# Altium PCB hat_template 2020V3.PcbDoc
Units mm, origin at the board's own origin, x right, y up, seen from the top; angles counter-clockwise.
Board outline 64 x 85 mm, 4 copper layers (Top Side, Ground Plane, Power Plane, Bottom Side), stack 0.844 mm thick; 101 components, 62 nets, 332 pads, 88 vias.
Unrouted connection lines stored in the file: 2.
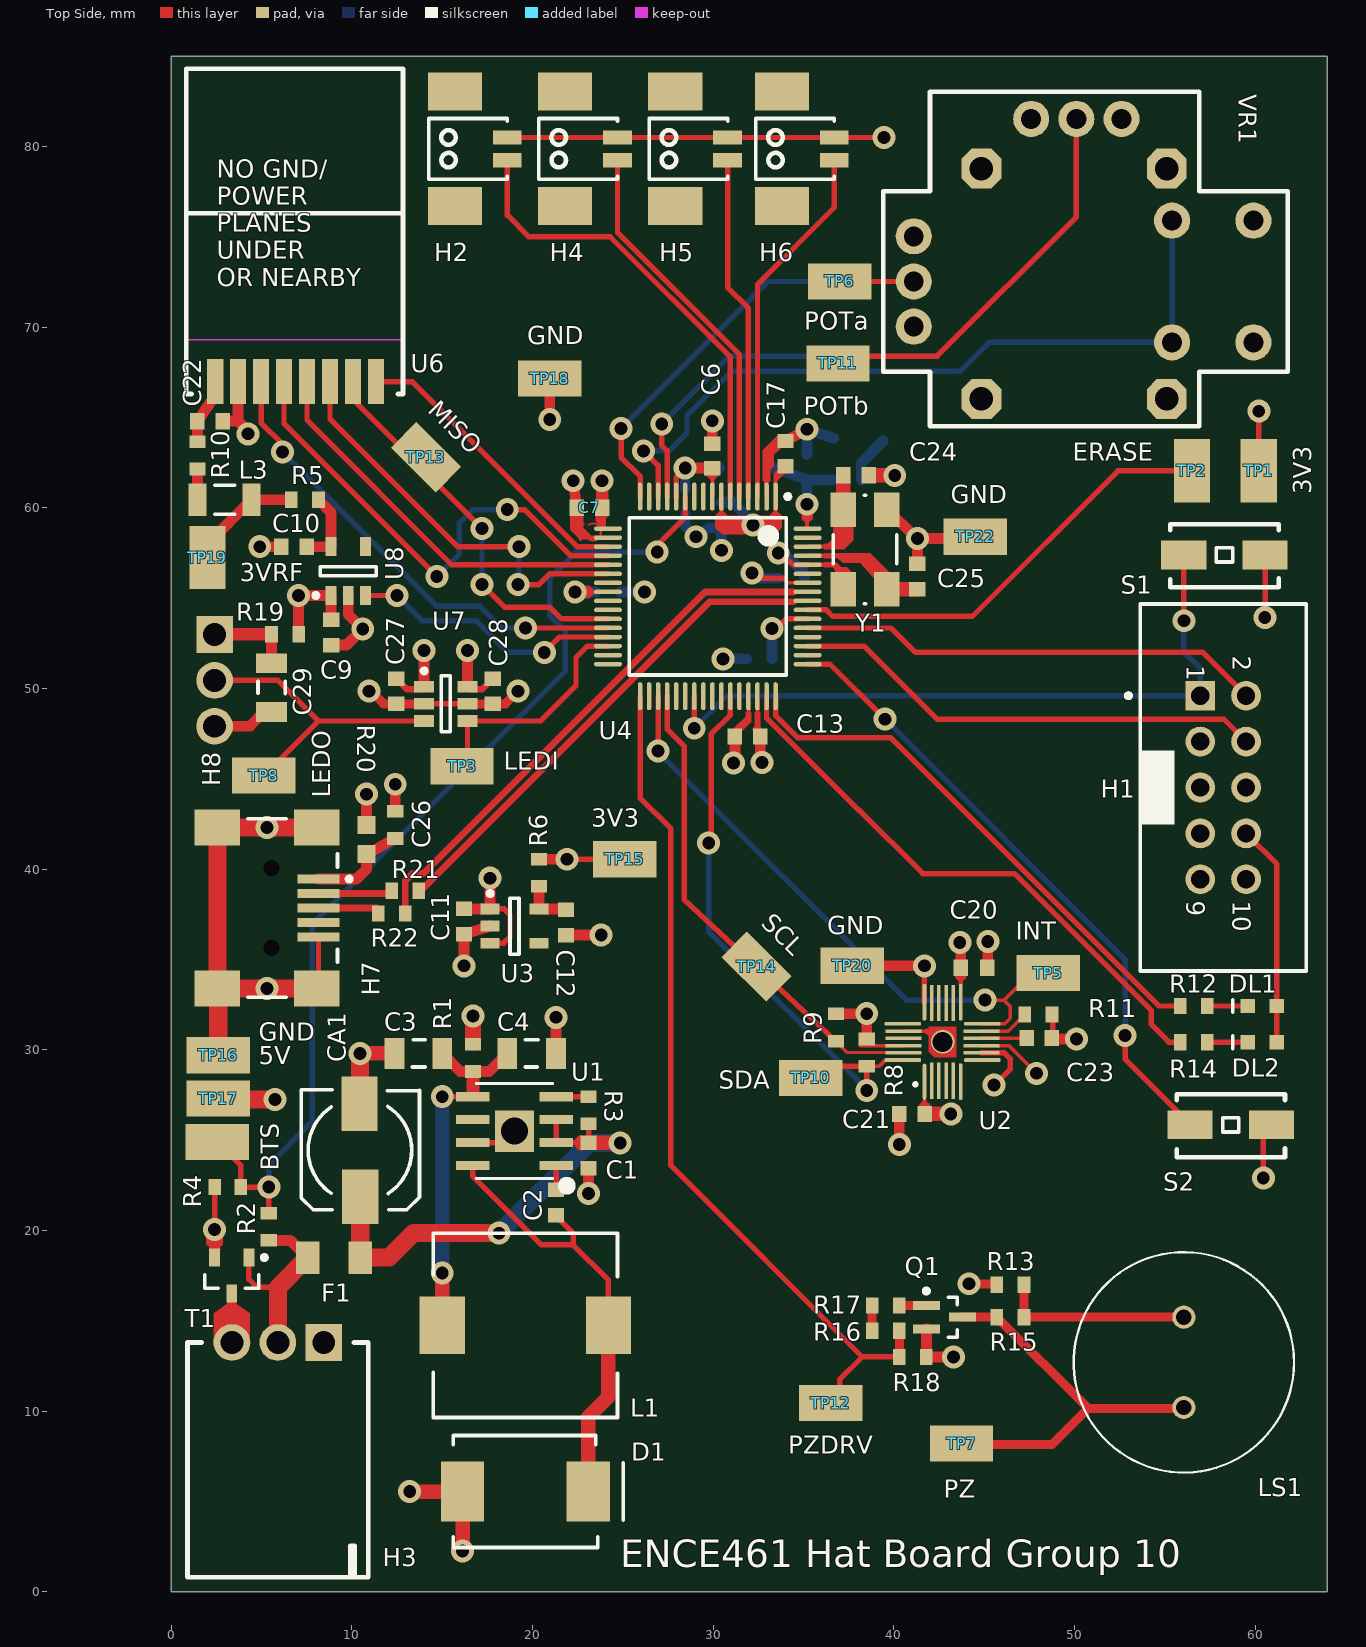
[diagram p0: Top Side view]
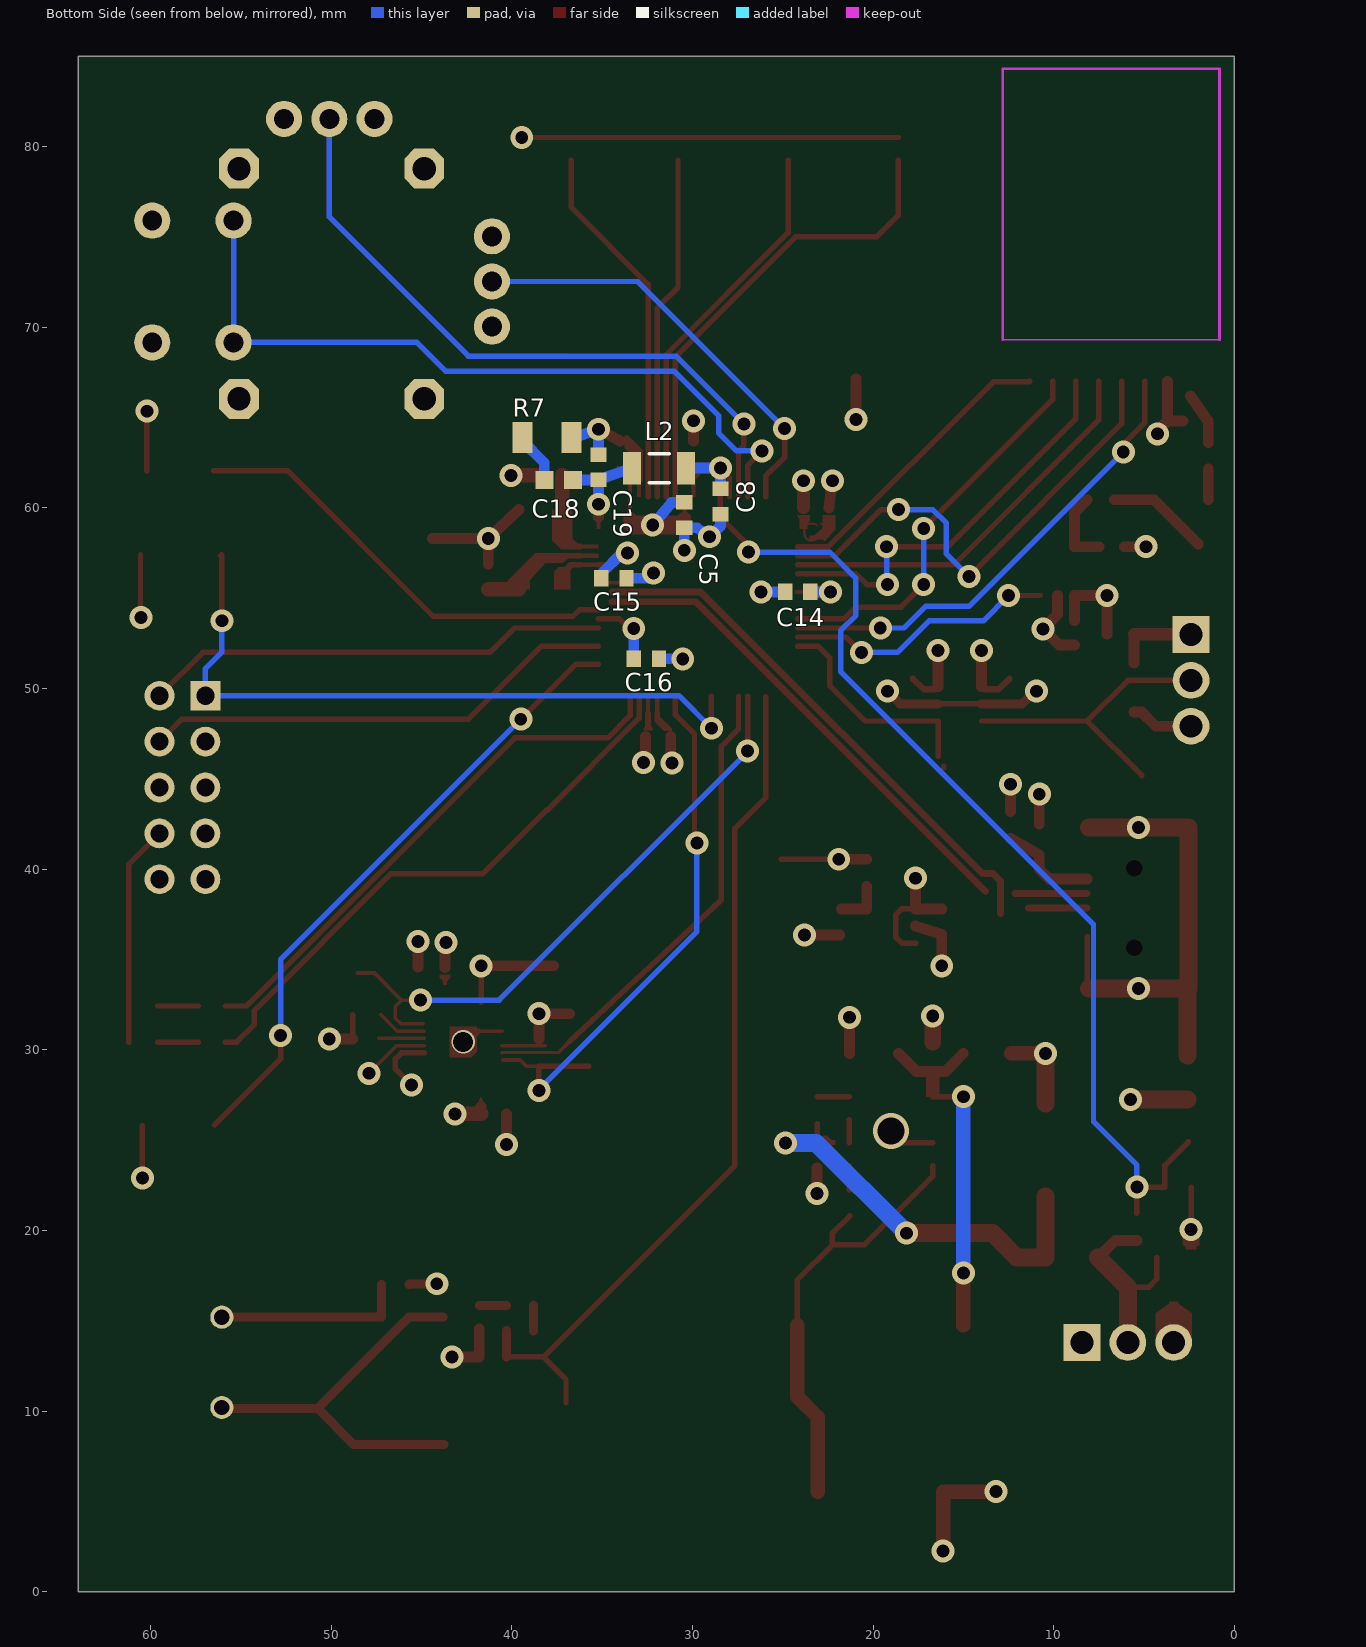
[diagram p1: Bottom Side view, seen from below]
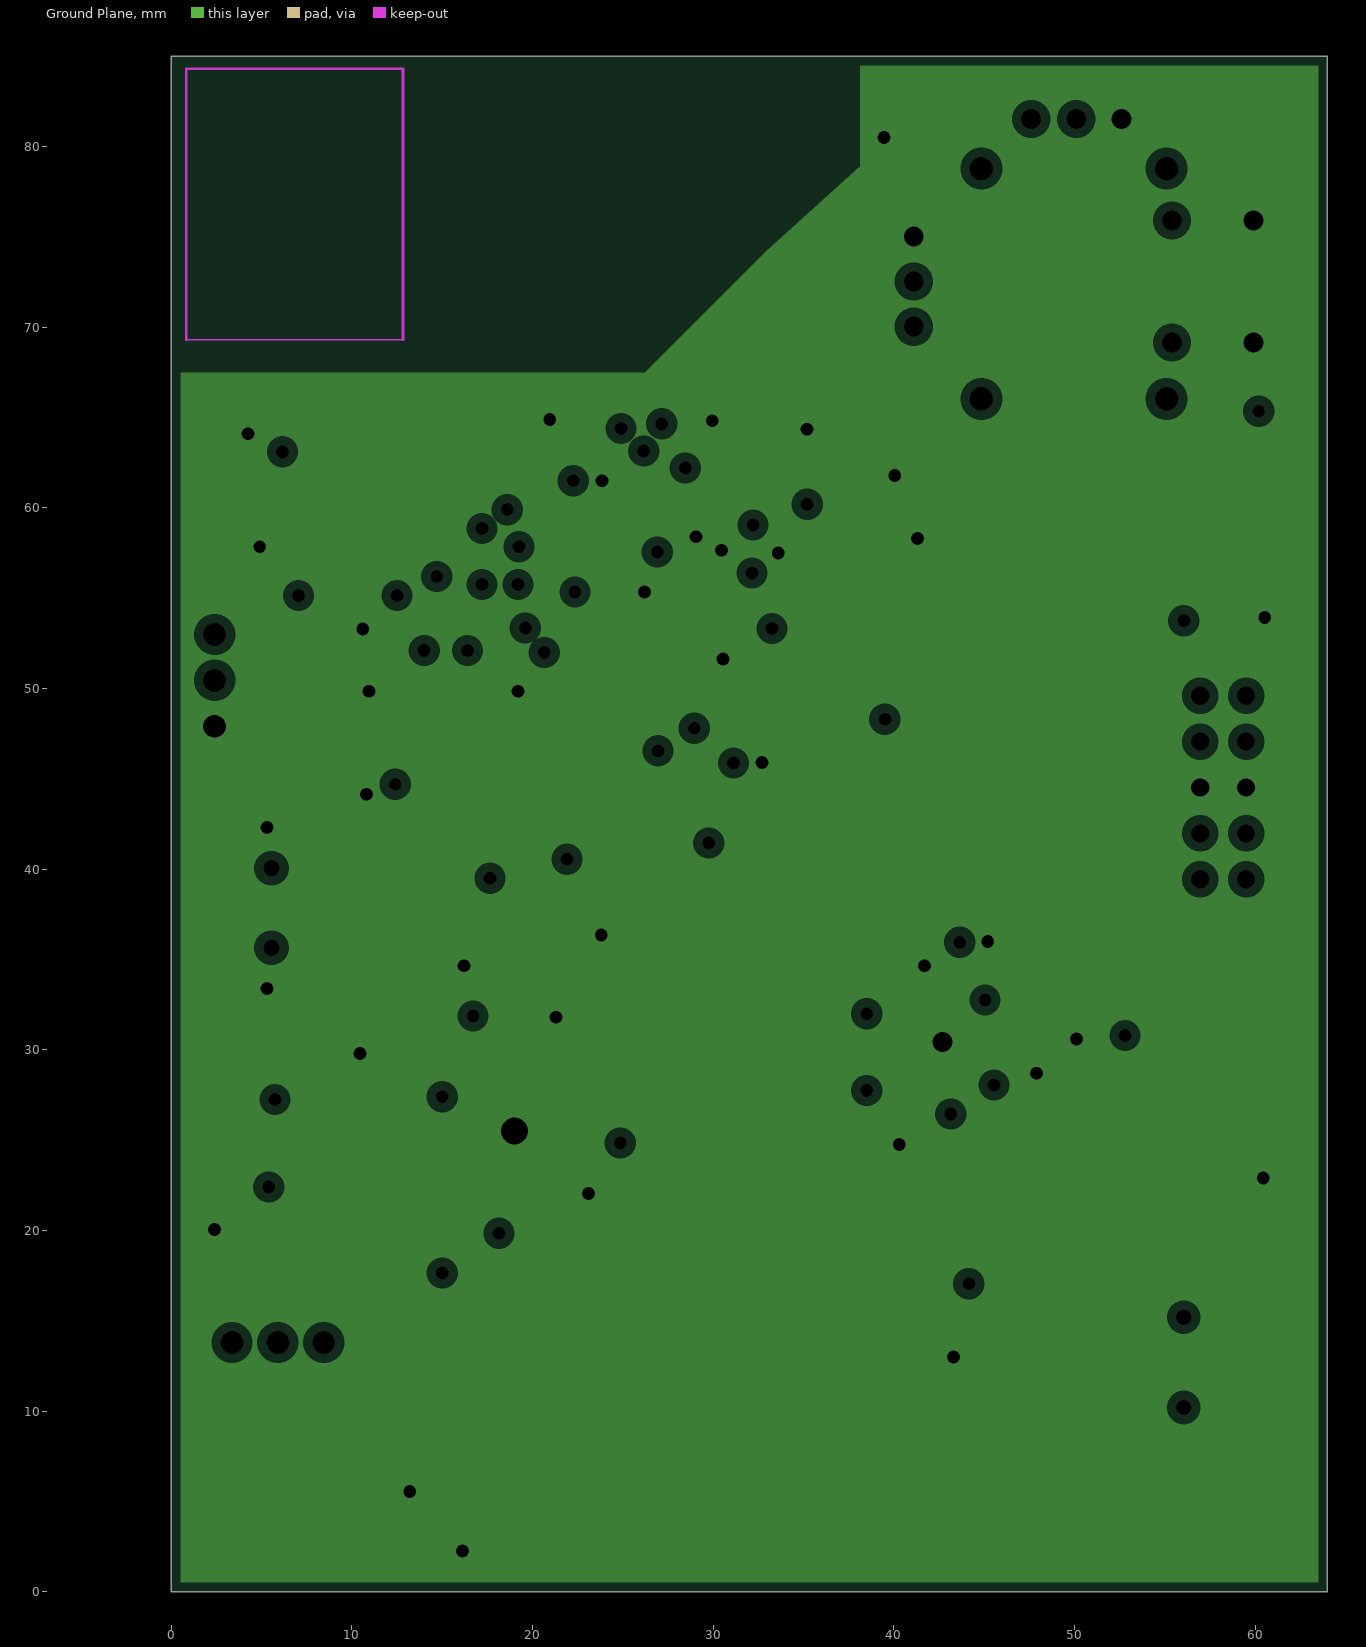
[diagram p2: Ground Plane, clearances drawn from the general rule]
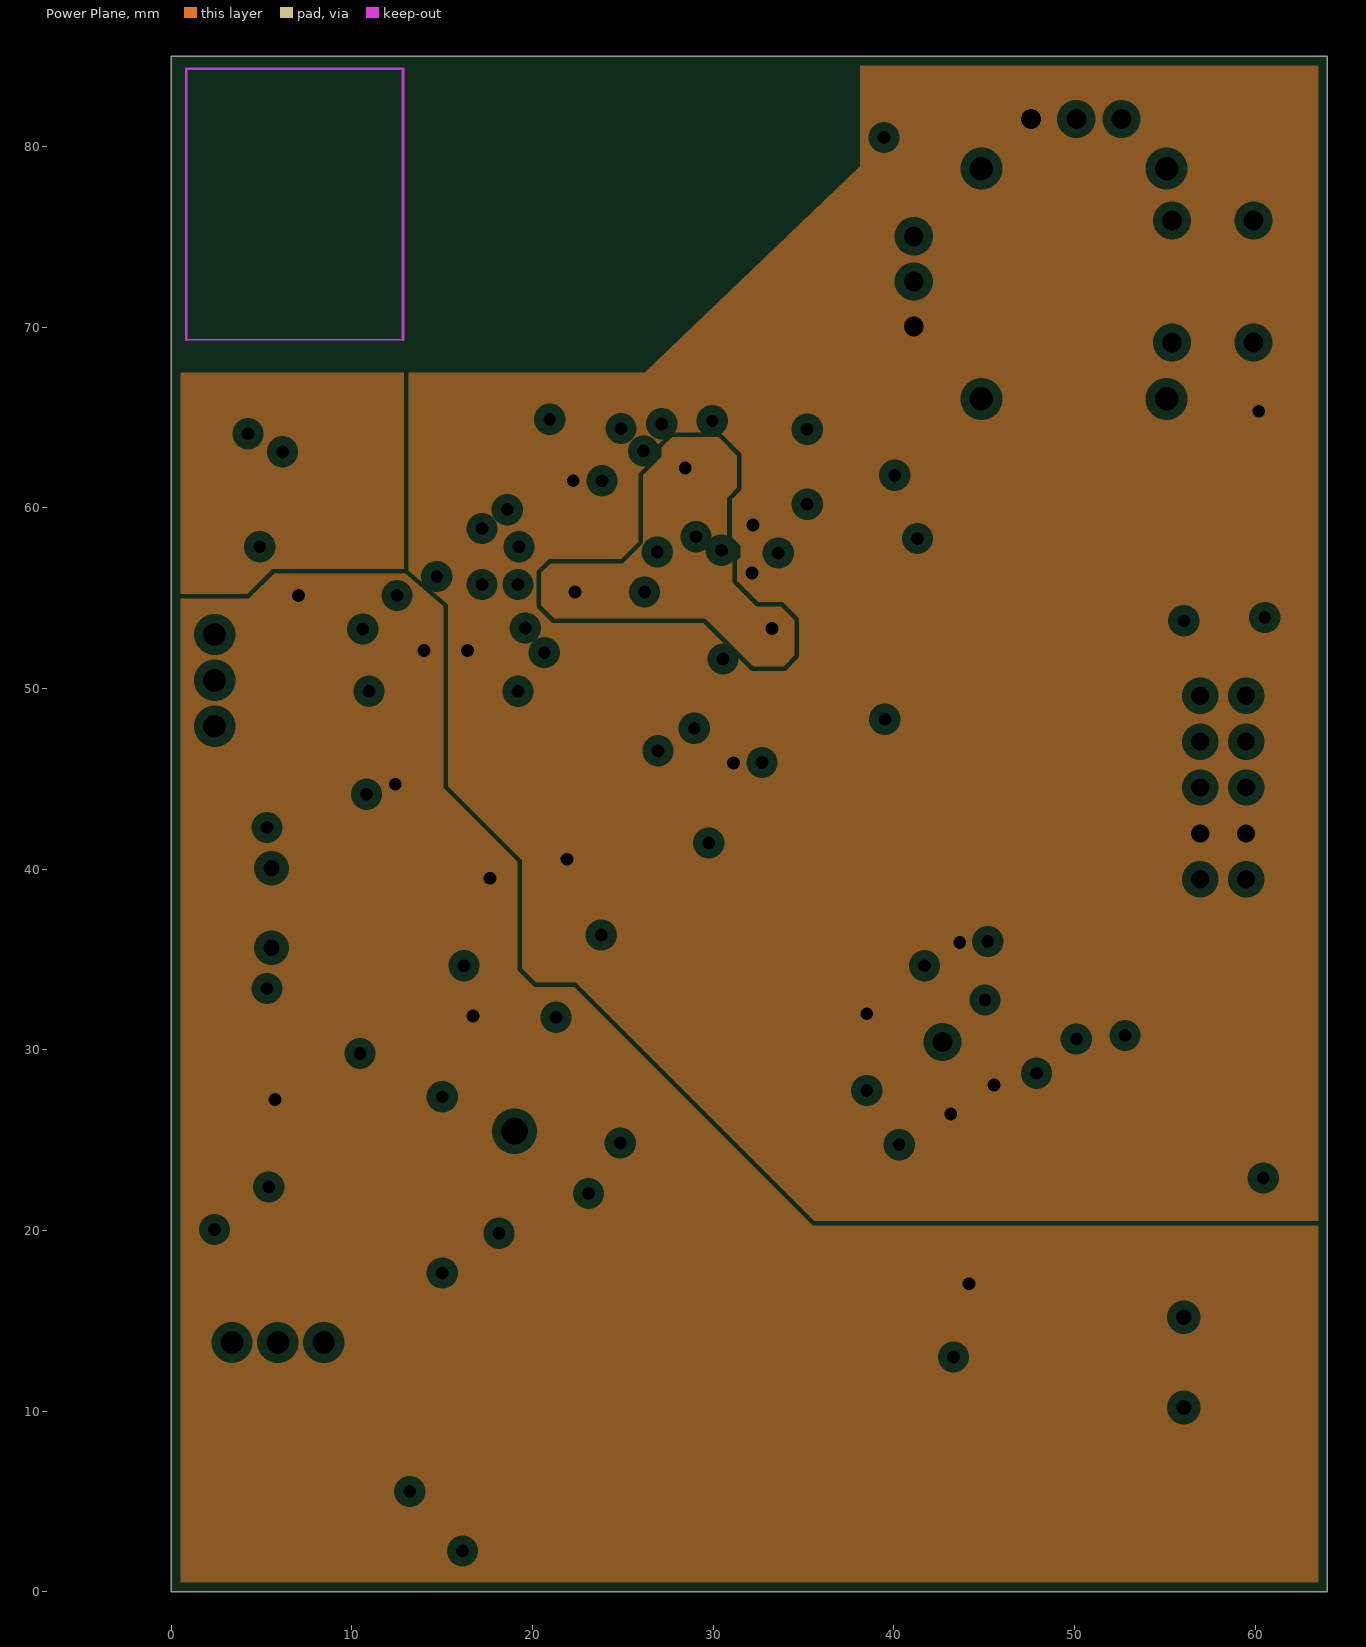
[diagram p3: Power Plane, clearances drawn from the general rule]

## Layer stack, top to bottom
Top Solder: solder mask 0.0102, Solder Resist, Dk 3.5
Top Side: signal copper 0.0356
Dielectric 1: core 0.32, FR-4, Dk 4.8
Ground Plane: plane copper 0.036, net GND
Dielectric 3: prepreg 0.127, Dk 4.2
Power Plane: plane copper 0.036, net (Multiple Nets)
Dielectric 4: core 0.254, Dk 4.2
Bottom Side: signal copper 0.0356
Bottom Solder: solder mask 0.0102, Solder Resist, Dk 3.5

## Board outline
0,85 64,85 64,0 0,0 0,85

## Design rules (kind name [scope] priority, off if disabled: settings)
BoardOutlineClearance [All] p1: gap=0.5 ignorepadtopadclearanceinfootprint=FALSE
Clearance Min_Clearance_Circuit_Labs [All] p1: gap=0.15 ignorepadtopadclearanceinfootprint=FALSE except(0: Arc-Hole Track-Hole SMDPad-Hole THPad-Hole Via-Hole Fill-Hole Poly-Hole Region-Hole Text-Hole)
DiffPairsRouting [All] p1: maxlimit=0.254 minlimit=0.254 mostfreqgap=0.254 toplayer_minwidth=0.381 toplayer_maxwidth=0.381 toplayer_prefwidth=0.381 bottomlayer_minwidth=0.381 bottomlayer_maxwidth=0.381 bottomlayer_prefwidth=0.381 maxuncoupledlength=12.7
FanoutControl Fanout_BGA [IsBGA] p1 off: bgadir=Out bgaviamode=Centered fanoutstyle=Auto fanoutdirection=Alternating viagrid=0.025 // Fanout_BGA (Default Rule)
HoleSize [All] p1: absolutevalues=TRUE maxlimit=10 minlimit=0.3 maxpercent=80.000 minpercent=20.000
MinimumAnnularRing [All] p1: minimumring=0.1
MinimumSolderMaskSliver [All] p1: minsoldermaskwidth=0.1
NetAntennae [All] p1: netantennaetolerance=1
PasteMaskExpansion [All] p1 off: expansion=0.2
PlaneClearance [All] p1: clearance=0.508
PlaneConnect [All] p1: planeconnectstyle=Relief reliefexpansion=0.508 reliefentries=4 reliefconductorwidth=0.254 reliefairgap=0.254
PolygonConnect [All] p1: connectstyle=Relief reliefconductorwidth=0.254 reliefentries=4 polygonreliefangle="90 Angle" airgapwidth=0.254
RoutingVias [All] p1: holewidth=0.5 width=1 viastyle="Through Hole" minholewidth=0.3 minwidth=0.6 maxholewidth=1 maxwidth=2
SMDNeckDown [All] p1 off: percent=50.000
SMDToCorner [All] p1: distance=98425
SMDToPlane [All] p1: distance=1968504
SilkToSolderMaskClearance SilkscreenOverComponentPads [IsPad] p1: minsilkscreentomaskgap=0.254 clearancetoexposedcopper=TRUE
SolderMaskExpansion [All] p1: expansion=0.102
ViasUnderSMD [All] p1: allowed=FALSE
Width [All] p1: maxlimit=2 minlimit=0.15 preferedwidth=0.3
21 further rules are at their usual default settings.

## Classes and differential pairs
component class "Test Points Sheet": BTS TP3 TP5 TP6 TP7 TP8 TP10 TP11 TP12 TP13 TP14 TP15 TP16 TP17 TP18 TP19 TP20 TP22
component class Connections: C26 C29 H1 H2 H3 H4 H5 H6 H7 H8 R19 R20 R21 R22
component class "Power Sheet": C1 C2 C3 C4 C5 C6 C7 C8 C9 C10 C11 C12 C13 C14 C15 C16 C17 C18 C19 CA1 D1 F1 L1 L2 R1 R2 R3 R4 R5 R6 R7 T1 U1 U3 U8
component class "Main Sheet": C20 C21 C22 C23 C24 C25 C27 C28 DL1 DL2 L3 LS1 Q1 R8 R9 R10 R11 R12 R13 R14 R15 R16 R17 R18 S1 S2 TP1 TP2 U2 U4 U6 U7 VR1 Y1
differential pair D: +D_P -D_N

## Components (designator, comment, footprint, x,y, rotation, side; value= is the part's Value field where it differs from the comment)
BTS "TP" TP_1206#1 2.55,24.9 r180 top (schematic designator TP21)
C1 "100nF" CAPC1608L#1 23.1,24.15 r90 top
C2 "100nF" CAPC1608L#1 21.3,21.55 r270 top
C3 "22uF" CAPC3216L#1 13.7,29.8 r0 top
C4 "22uF" CAPC3216L#2 19.95,29.8 r180 top
C5 "100nF" CAPC1608L#1 30.45,59.6 r90 bottom
C6 "100nF" CAPC1608L#2 29.95,62.85 r90 top
C7 "100nF" CAPC1608L#1 23.15,60 r180 top
C8 "100nF" CAPC1608L#1 28.45,60.35 r270 bottom
C9 "1uF" CAPC1608L#1 8.85,53.1 r90 top
C10 "1uF" CAPC1608L#1 6.8,57.85 r0 top
C11 "1uF" CAPC1608L#1 16.2,37.1 r90 top
C12 "1uF" CAPC1608L#1 21.85,37.05 r90 top
C13 "100nF" CAPC1608L#1 31.9,47.35 r180 top
C14 "100nF" CAPC1608L#1 24.175,55.35 r0 bottom
C15 "100nF" CAPC1608L#1 34.35,56.1 r180 bottom
C16 "100nF" CAPC1608L#1 32.55,51.65 r180 bottom
C17 "100nF" CAPC1608L#1 34,63 r270 top
C18 "4.7uF" CAPC1608N 37.4,61.55 r180 bottom
C19 "100nF" CAPC1608L#1 35.2,62.25 r270 bottom
C20 "100nF" CAPC1608L#3 44.4,34.55 r0 top
C21 "10nF" CAPC1608L#1 41,26.45 r180 top
C22 "10uF" CAPC1608L#1 2.15,64.8 r180 top
C23 "100nF" CAPC1608L#1 48.05,30.65 r0 top
C24 "27pF" CAPC1608L#1 37.9,61.8 r180 top
C25 "27pF" CAPC1608L#1 41.3,56.2 r270 top
C26 "4.7uF" CAPC1608N 10.8,41.65 r90 top
C27 "10nF" CAPC1608L#1 12.45,49.85 r90 top
C28 "10nF" CAPC1608L#1 17.8,49.85 r90 top
C29 "22uF" CAPC3216L#2 5.55,50.05 r90 top
CA1 "100uF/16V" NICH-1 10.45,24.45 r270 top
D1 "VS-30BQ015-M3/9AT" SMC 19.6,5.55 r0 top
DL1 "Bright Green" WL-SMCW0603 59.6,32.425 r0 top
DL2 "Red" WL-SMCW0603 59.6,30.425 r0 top
F1 "5A" RESC3216N 9,18.5 r0 top
H1 "Header 5X2 Vert" IDC2.54-V10D 58.23,44.52 r270 top
H2 "SMD Vert 1.25mm" SD-53398-0219 18.6,80.5 r90 top
H3 "Battery_HEADER_3pin" BATT_HEADER_3POS 5.9,13.8 r180 top
H4 "SMD Vert 1.25mm" SD-53398-0219 24.7,80.5 r90 top
H5 "SMD Vert 1.25mm" SD-53398-0219 30.8,80.5 r90 top
H6 "SMD Vert 1.25mm" SD-53398-0219 36.7,80.5 r90 top
H7 "JS_USB_MINI_B" USB/SM0.8-6H5 0.3,37.85 r180 top
H8 "HEADER_3" HEADER_3POS 2.4,50.45 r270 top
L1 "IND 5.2UH 6A" INDUCTOR5u2 19.6,14.75 r180 top
L2 "1A max, Idc 0.3R," INDC3216L 31.85,62.2 r180 bottom
L3 "1A max, Idc 0.3R," INDC3216L 2.95,60.45 r180 top
LS1 "PS1240P02BT" XDCR_PS1240P02BT 56.05,12.7 r90 top
Q1 "BC817W" SOT323_M 42.8,15.2 r0 top
R1 "0R" RESC1608L#1 16.7,29.55 r90 top
R2 "200K" RESC1608L#1 5.4,20.2 r270 top
R3 "100K" RESC1608L#1 23.1,26.65 r90 top
R4 "100K" RESC1608L#2 3.15,22.4 r0 top
R5 "0R" RESC1608L#1 7.4,60.45 r180 top
R6 "0R" RESC1608L#1 20.35,39.8 r90 top
R7 "1R" RESC3216L 38.05,63.9 r0 bottom
R8 "2K2" RESC1608L#1 38.5,29.85 r90 top
R9 "2K2" RESC1608L#3 36.8,31.25 r270 top
R10 "10R" RESC1608L#1 1.45,62.9 r270 top
R11 "0R" RESC1608L#1 48,31.95 r180 top
R12 "470R" RESC1608L#1 56.6,32.425 r180 top
R13 "0R" RESC1608L#1 46.45,17 r180 top
R14 "680R" RESC1608L#1 56.6,30.425 r180 top
R15 "1K" RESC1608L#1 46.45,15.2 r0 top
R16 "10R" RESC1608L#1 39.55,14.45 r180 top
R17 "0R" RESC1608L#1 39.55,15.85 r0 top
R18 "1K" RESC1608L#1 41.05,13 r180 top
R19 "0R" RESC1608L#1 6.3,53 r0 top
R20 "0R" RESC1608L#1 12.4,42.45 r90 top
R21 "27R" RESC1608L#1 12.95,38.8 r0 top
R22 "27R" RESC1608L#1 12.2,37.55 r0 top
S1 "EVQPNF05M" EVQPNF05M 58.3,57.4 r180 top
S2 "EVQPNF05M" EVQPNF05M 58.65,25.85 r180 top
T1 "BSH105,215" SOT23_L 3.35,17.5 r270 top
TP1 "Erase" TP_1206#1 60.2,62.05 r90 top value=TP
TP2 "Erase" TP_1206#1 56.5,62.05 r90 top value=TP
TP3 "TP" TP_1206#1 16.1,45.7 r180 top
TP5 "TP" TP_1206#1 48.55,34.25 r0 top
TP6 "TP" TP_1206#1 37,72.53 r0 top
TP7 "TP" TP_1206#2 43.75,8.15 r0 top
TP8 "TP" TP_1206#1 5.125,45.175 r0 top
TP10 "TP" TP_1206#1 35.4,28.45 r0 top
TP11 "TP" TP_1206#1 36.9,68 r0 top
TP12 "TP" TP_1206#1 36.5,10.45 r0 top
TP13 "TP" TP_1206#1 14.1,62.8 r135 top
TP14 "TP" TP_1206#1 32.4,34.6 r135 top
TP15 "TP" TP_1206#1 25.1,40.55 r180 top
TP16 "TP" TP_1206#1 2.6,29.7 r180 top
TP17 "TP" TP_1206#1 2.6,27.3 r180 top
TP18 "TP" TP_1206#1 20.95,67.15 r180 top
TP19 "TP" TP_1206#1 2,57.25 r270 top
TP20 "TP" TP_1206#1 37.7,34.65 r0 top
TP22 "TP" TP_1206#1 44.5,58.4 r180 top
U1 "ADP2302ARDZ-5.0 BUCK" RD_8_1 19,25.5 r180 top locked value=Value
U2 "MPU-9250" QUAD24 41.693,29.085 r90 top locked
U3 "CAT6219-330TDGT3" SOT95P280X145-5N 19,36.85 r0 top
U4 "ATSAM4S8BA-ANR" LQFP64_L 29.7,55.1 r270 top locked
U6 "nRF24 SMD" NRF24 0.829,66.3 r0 top
U7 "SN74LVC1T45" SOT23-6_N 15.2,49.15 r0 top
U8 "CAT6219-330TDGT3" SOT95P280X145-5N 9.8,56.5 r90 top
VR1 "Joystick 10k with Sw" Joystick_Sw 41.1,72.53 r180 top
Y1 "12MHz" 6.0X3.5-4 38.4,57.7 r90 top

## Footprints (in the part's own frame and the unit in brackets; to place one, negate y for a bottom-side part, rotate by r counter-clockwise, add the part's x,y. Pads: shape width x height; smd on the part's side, far side on the other; paste and mask are expansions set on the pad)
6.0X3.5-4 [mm] "4 SMD 6.0X3.5 mm No Lead Crystal"
  rect 1.9x1.4 smd: 1(-2.2,-1.2) 2(2.2,-1.2) 3(2.2,1.2) 4(-2.2,1.2)
  silkscreen extent -3,-1.75 3,1.75, body extent -3,-1.75 3,1.75, height 1.2
BATT_HEADER_3POS [mil]
  rect 80x80 hole 50: 1(-100,0)
  round 80 hole 50: 2(0,0) 3(100,0)
  silkscreen extent -197,0 197,512
CAPC1608L#1 [mm] "Chip Capacitor, Body 1.6x0.8mm, IPC High Density"
  rect 0.8x0.9 smd: 1(-0.7,0) 2(0.7,0)
  body extent -0.87,-0.48 0.87,0.48, height 0.85
CAPC1608L#2 [mm] "Chip Capacitor, Body 1.6x0.8mm, IPC High Density"
  rect 0.8x0.9 smd: 1(-0.65,0) 2(0.7,0)
  body extent -0.87,-0.48 0.87,0.48, height 0.85
CAPC1608L#3 [mm] "Chip Capacitor, Body 1.6x0.8mm, IPC High Density"
  rect 0.8x0.9 smd: 1(-0.7,0) 2(0.757,0)
  body extent -0.87,-0.48 0.87,0.48, height 0.85
CAPC1608N [mm] "Chip Capacitor, Body 1.6x0.8mm, IPC Medium Density"
  rect 1x1 smd: 1(-0.8,0) 2(0.8,0)
  body extent -0.87,-0.48 0.87,0.48, height 0.85
CAPC3216L#1 [mm] "Chip Capacitor, Body 3.2x1.6mm, IPC High Density"
  rect 1.1x1.7 smd: 1(-1.35,0) 2(1.3,0)
  silkscreen extent -0.35,-0.75 0.35,0.75, body extent -1.7,-0.9 1.7,0.9, height 1.35
CAPC3216L#2 [mm] "Chip Capacitor, Body 3.2x1.6mm, IPC High Density"
  rect 1.1x1.7 smd: 1(-1.35,0) 2(1.35,0)
  silkscreen extent -0.35,-0.75 0.35,0.75, body extent -1.7,-0.9 1.7,0.9, height 1.35
EVQPNF05M [mm] "Panansonic light touch SMD push button switch"
  rect 2.5x1.6 smd: 1(-2.25,0) 2(2.25,0)
  silkscreen extent -3,-1.7 3,1.8, body extent -3,-1.7 3,1.8, height 5
HEADER_3POS [mil]
  rect 80x80 hole 50: 1(-100,0)
  round 80 hole 50: 2(0,0) 3(100,0)
IDC2.54-V10D [mm] "Connector; IDC, Low Profile Male Header, Thru-Hole; 10 Position; Vertical; Pitch 2.54 mm; Body 20.32 x 9.2 x 9.45 mm (LxWxH)"
  rect 1.65x1.65 hole 1: 1(-5.08,-1.27)
  round 1.65 hole 1: 2(-5.08,1.27) 3(-2.54,-1.27) 4(-2.54,1.27) 5(0,-1.27) 6(0,1.27) 7(2.54,-1.27) 8(2.54,1.27) 9(5.08,-1.27) 10(5.08,1.27)
  silkscreen extent -10.16,-5.37 10.16,4.6, body extent -10.16,-4.6 10.16,4.6, height 9.45
INDC3216L [mm] "Chip Inductor, Body 3.2x1.6mm, IPC High Density"
  rect 1x1.8 smd: 1(-1.5,0) 2(1.5,0)
  silkscreen extent -0.55,-0.8 0.55,0.8, body extent -1.75,-0.95 1.75,0.95, height 1.9
INDUCTOR5u2 [mm]
  rect 2.5x3.2 smd: 1(-4.6,0) 2(4.6,0)
  silkscreen extent -5.1,-5.1 5.1,5.1
Joystick_Sw [mm]
  round 2 hole 1.1: 1(0,2.5) 2(0,0) 3(0,-2.5) 4(-6.5,-9) 5(-9,-9) 6(-11.5,-9) 7(-14.3,-3.37) 8(-18.8,-3.37) 9(-18.8,3.37) 10(-14.3,3.37)
  oct 2.2x2.2 hole 1.3: 11(-14,-6.25) 12(-3.75,-6.25) 13(-14,6.5) 14(-3.75,6.5)
  silkscreen extent -20.7,-10.5 1.7,8
LQFP64_L [mm] "Thin QFP, 64-Leads, Body 10x10mm, Pitch 0.5mm, IPC High Density"
  oval 1.55x0.25 smd mask+0.07: 1(-5.525,3.75) 2(-5.525,3.25) 3(-5.525,2.75) 4(-5.525,2.25) 5(-5.525,1.75) 6(-5.525,1.25) 7(-5.525,0.75) 8(-5.525,0.25) 9(-5.525,-0.25) 10(-5.525,-0.75) 11(-5.525,-1.25) 12(-5.525,-1.75) 13(-5.525,-2.25) 14(-5.525,-2.75) 15(-5.525,-3.25) 16(-5.525,-3.75) 33(5.525,-3.75) 34(5.525,-3.25) 35(5.525,-2.75) 36(5.525,-2.25) 37(5.525,-1.75) 38(5.525,-1.25) 39(5.525,-0.75) 40(5.525,-0.25) 41(5.525,0.25) 42(5.525,0.75) 43(5.525,1.25) 44(5.525,1.75) 45(5.525,2.25) 46(5.525,2.75) 47(5.525,3.25) 48(5.525,3.75)
  oval 0.25x1.55 smd mask+0.07: 17(-3.75,-5.525) 18(-3.25,-5.525) 19(-2.75,-5.525) 20(-2.25,-5.525) 21(-1.75,-5.525) 22(-1.25,-5.525) 23(-0.75,-5.525) 24(-0.25,-5.525) 25(0.25,-5.525) 26(0.75,-5.525) 27(1.25,-5.525) 28(1.75,-5.525) 29(2.25,-5.525) 30(2.75,-5.525) 31(3.25,-5.525) 32(3.75,-5.525) 49(3.75,5.525) 50(3.25,5.525) 51(2.75,5.525) 52(2.25,5.525) 53(1.75,5.525) 54(1.25,5.525) 55(0.75,5.525) 56(0.25,5.525) 57(-0.25,5.525) 58(-0.75,5.525) 59(-1.25,5.525) 60(-1.75,5.525) 61(-2.25,5.525) 62(-2.75,5.525) 63(-3.25,5.525) 64(-3.75,5.525)
  silkscreen extent -5.65,-4.35 4.35,4.55, body extent -5,-5 5,5, height 1.6
NICH-1 [mm] "Electrolytic capacitor"
  rect 3x2 smd: 1(-2.561,-0.022) 2(2.584,0.011)
  silkscreen extent -3.34,-3.25 3.3,3.3, body extent -3.2,-3.2 3.2,3.2, height 5.3
NRF24 [mm]
  rect 0.9x2.5 smd: 1(1.6,0.7) 2(2.871,0.7) 3(4.143,0.7) 4(5.414,0.7) 5(6.686,0.7) 6(7.957,0.7) 7(9.229,0.7) 8(10.5,0.7)
  Keep-Out Layer lines w0.1: 0,3 12,3
  Keep-Out Layer lines w0.15: 0,3 0,18 12,18 12,3
  silkscreen extent 0,0 12,18
QUAD24 [mm]
  oval 2x0.2 smd paste+0.02 mask+0.015: 1(-0.85,0)
  rect 2x0.2 smd paste+0.02 mask+0.015: 2(-0.8,-0.4) 3(-0.8,-0.8) 4(-0.8,-1.2) 5(-0.8,-1.6) 14(3.5,-1.6) 15(3.5,-1.2) 16(3.5,-0.8) 17(3.5,-0.4)
  rrect50% 2x0.2 smd paste+0.02 mask+0.015: 6(-0.85,-2) 13(3.55,-2) 18(3.55,0)
  rrect50% 0.2x2 smd paste+0.02 mask+0.015: 7(0.35,-3.2) 12(2.35,-3.2) 19(2.35,1.2) 24(0.35,1.2)
  rect 0.2x2 smd paste+0.02 mask+0.015: 8(0.75,-3.15) 9(1.15,-3.15) 10(1.55,-3.15) 11(1.95,-3.15) 20(1.95,1.15) 21(1.55,1.15) 22(1.15,1.15) 23(0.75,1.15)
  Top Side region: 0.5,-1.75 0.5,-0.55 0.8,-0.25 2.2,-0.25 2.2,-1.75
  silkscreen extent -1.05,0.45 -0.95,0.55
RD_8_1 [mil]
  rect 74x20 smd paste+0 mask+0: 1(-91,75) 2(-91,25) 3(-91,-25) 4(-91,-75) 5(91,-75) 6(91,-25) 7(91,25) 8(91,75)
  rect 84.65x90 smd paste-44.5 mask+0: EPAD(0,0)
  silkscreen extent -118,-104 84,123, body extent 0,0 10,10, height 10
RESC1608L#1 [mm] "Chip Resistor, Body 1.6x0.8mm, IPC High Density"
  rect 0.7x0.9 smd: 1(-0.75,0) 2(0.75,0)
  body extent -0.85,-0.48 0.85,0.48, height 0.9
RESC1608L#2 [mm] "Chip Resistor, Body 1.6x0.8mm, IPC High Density"
  rect 0.7x0.9 smd: 1(-0.75,0) 2(0.7,0)
  body extent -0.85,-0.48 0.85,0.48, height 0.9
RESC1608L#3 [mm] "Chip Resistor, Body 1.6x0.8mm, IPC High Density"
  rect 0.7x0.9 smd: 1(-0.75,0) 2(0.785,0)
  body extent -0.85,-0.48 0.85,0.48, height 0.9
RESC3216L [mm] "Chip Resistor, Body 3.1x1.6mm, IPC High Density"
  rect 1.1x1.7 smd: 1(-1.35,0) 2(1.35,0)
  body extent -1.68,-0.87 1.68,0.87, height 2.54
RESC3216N [mm] "Chip Resistor, Body 3.2x1.6mm, IPC Medium Density"
  rect 1.3x1.8 smd: 1(-1.45,0) 2(1.45,0)
  body extent -1.68,-0.87 1.68,0.87, height 0.71
SD-53398-0219 [mm] "Molex Pico Blade 2 Pos Vert SMD Header"
  rect 0.8x1.6 smd: 1(0,0) 2(-1.25,0)
  rect 2.1x3 smd: M(-3.8,2.9) M(2.55,2.9)
  silkscreen extent -2.3,0 1.05,4.35, body extent -2.48,0.1 1.28,4.24, height 4.75
SMC [mm] "DO-214-AB/SMC; 2 C-Bend Leads; Body 7.9 x 5.9 mm, inc. leads (LxW)"
  rect 2.4x3.3 smd: 1(-3.475,0) 2(3.475,0)
  silkscreen extent -4,-3.1 5.43,3.1
SOT23-6_N [mm]
  rect 1.1x0.65 smd: 1(-1.2,0.95) 2(-1.2,0) 3(-1.2,-0.95) 4(1.2,-0.95) 5(1.2,0) 6(1.2,0.95)
  silkscreen extent -1.32,-1.55 0.25,1.95, body extent -0.9,-1.55 0.9,1.55, height 1.45
SOT23_L [mm] "SOT23, 3-Leads, Body 2.9x1.3mm, Pitch 0.95mm, Lead Span 2.3mm, IPC High Density"
  rect 1x0.6 smd: 1(-1,0.95) 2(-1,-0.95) 3(1,0)
  silkscreen extent -1.12,-1.5 0.7,1.93, body extent -0.7,-1.5 0.7,1.5, height 1.1
SOT95P280X145-5N [mm] "SOT23, 5-Leads, Body 2.90x2.80mm, Pitch 0.95mm, IPC Medium Density"
  rect 1.05x0.6 smd: 1(-1.35,0.95) 2(-1.35,0) 3(-1.35,-0.95) 4(1.35,-0.95) 5(1.35,0.95)
  silkscreen extent -1.47,-1.55 0.25,1.92, body extent -0.87,-1.52 0.87,1.53, height 1.45
SOT323_M [mm] "SOT323, 3-Leads, Body 2.0x1.3mm, Pitch 0.65mm, Lead Span 2.1mm, IPC Low Density"
  rect 1.5x0.5 smd: 1(-1,0.65) 2(-1,-0.65) 3(1,0)
  silkscreen extent -1.12,-1.1 0.7,1.57, body extent -0.7,-1.1 0.7,1.1, height 1.1
TP_1206#1 [mm] "Test Point Pad"
  rect 3.5x2 smd: 1(0,0)
  body extent -1.62,-0.85 1.63,0.8, height 2
TP_1206#2 [mm] "Test Point Pad"
  rect 3.5x2 smd: 1(0,0.05)
  body extent -1.62,-0.85 1.63,0.8, height 2
USB/SM0.8-6H5 [mm] "Connector; USB2.0, Type B, SM; 5 Position; Right Angle"
  rect 2.3x0.5 smd mask+0.07: 1(-7.85,-1.6) 2(-7.85,-0.8) 3(-7.85,0) 4(-7.85,0.8) 5(-7.85,1.6)
  rect 2.5x2 smd: 6(-7.75,4.45) 7(-2.25,4.45) 8(-7.75,-4.45) 9(-2.25,-4.45)
  round 0.6 hole 0.9 unplated: MH1(-5.25,2.2) MH2(-5.25,-2.2)
  silkscreen extent -9.68,-4.95 -3.95,4.95, body extent -8.9,-4.95 0.7,4.95, height 3.9
WL-SMCW0603 [mm] "2.4 x 0.8 x 0.7mm LED"
  rect 0.8x0.8 smd: 1(0,0) 2(1.6,0)
  silkscreen extent -0.85,-0.35 -0.85,0.35
XDCR_PS1240P02BT [mm]
  round 1.28 hole 0.85: 1(-2.5,0) 2(2.5,0)
  silkscreen extent -6.1,-6.1 6.1,6.1

## Part data
BTS TP1 TP2 TP3 TP5 TP6 TP7 TP8 TP10 TP11 TP12 TP13 TP14 TP15 TP16 TP17 TP18 TP19 TP20 TP22: library part TP_1206, "Test-Point 3.3x1.6x2.1mm SMD", Manufacturer="Harwin Inc", Manufacturer Part Number=S1751-46R, Supplier Part Number 1=952-1478-2-ND, Mounting Type="Surface Mount", Storage Location=ProtoPlace, Supplier="ECE Dept", Supplier 1=Digi-Key, Supplier 2=Farnell, Supplier Part Number 2=1826282, Type="PC Test Point"
C1 C2 C5 C6 C7 C8 C13 C14 C15 C16 C17 C19 C20 C23: library part CC_100nF_0603, "CAP CER 100nF X7R +-10% 50V 0603", Code_IPC="1608 [0603]", PackageReference=0603, Storage Location="PCB Assembly WS", Supplier="ECE Dept"
C3 C4 C29: library part CC_22uF_1206, "CAP CER 22uF Y5V -20% +80% 10V 1206", Dielectric=Y5V, Max Voltage=10V, Storage Location="PCB Assembly WS", Supplier="ECE Dept"
C9 C10 C11 C12: library part CC_1uF_0603, "CAP CER 1uF Y5V -20% +80% 16V 0603", Max Voltage=16V, Code_IPC="1608 [0603]", PackageReference=0603, Storage Location="PCB Assembly WS", Supplier="ECE Dept"
C18 C26: library part CC_4.7uF_0603, "CAP CER 4.7uF X5R +-20%  10V 0603", Max Voltage=10V, Code_IPC=2012[0805], Note="Footprint corresponds to dimensions for bulk cassette packaging. This case size has tightened tolerances.", PackageReference=0805, Storage Location="PCB Assembly WS", Supplier="ECE Dept"
C21 C27 C28: library part CC_10nF_0603, "CAP CER 10nF X7R +-10% 50V 0603", Code_IPC="1608 [0603]", PackageReference=0603, Storage Location="PCB Assembly WS", Supplier="ECE Dept"
C22: library part CC_10uF_0603, "CAP CER 10UF X5R +-20% 6V3 0603", Voltage - Rated=6.3V, Storage Location="PCB Assembly WS", Supplier="ECE Dept"
C24 C25: library part CC_27pF_0603, "CAP CER 27pF NPO/COG +-5% 50V 0603", Code_IPC="1608 [0603]", PackageReference=0603, Storage Location="PCB Assembly WS", Supplier="ECE Dept"
CA1: library part CA_100uF_16V, "CAP ALUM 100uF 16V SMD", Manufacturer=Nichcon, Manufacturer PN=UWX1C101MCL1GB, Supplier Part Number 1=1870677, Storage Location="PCB Assembly WS", Supplier="ECE Dept", Supplier 1=Farnell, Supplier 2=Digi-Key, Supplier Part Number 2=493-2105-1-ND
D1: library part DS_VS-30BQ015-M3, "DIODE, SCHOTTKY, 3A, 15V, DO-214AB / SMC", Average Rectified Current=3A, Forward Voltage=350mV, Manufacturer="Vishay Semiconductors", Max Forward Surge Current (Ifsm)=650A, Max Reverse Voltage (DC)=15V, Peak Reverse Current=4mA, Supplier Part Number=VS-30BQ015-M3/9AT-ND, Supplier Part Number 1=VS-30BQ015-M3/9ATGIDKR-ND, ComponentLink1Description=https://datasheet.ciiva.com/36181/vs-30bq015-m3-9at-36181258.pdf, ComponentLink1URL=https://datasheet.ciiva.com/36181/vs-30bq015-m3-9at-36181258.pdf, Manufacturer Part Number=VS-30BQ015-M3/9AT, Supplier=Digi-Key, Supplier 1=Digi-Key, Supplier 2=Element14, Supplier Part Number 2=2628288
DL1: library part DL_150060VS75000, "LED Bright Green 40mcd 0603 SMD", Forward Current If=30, Forward Voltage=2, Manufacturer="WURTH ELEKTRONIK", Manufacturer Part Number=150060VS75000, Supplier Part Number 1=2322073, LED Colour="Bright Green", LED Mounting=SMD, Luminous Intensity=40, Storage Location="PCB Assembly WS", Supplier="ECE Dept", Supplier 1=Farnell, Viewing Angle=140°, Wavelength Typ=570
DL2: library part DL_150060RS75000, "LED Red 250mcd 0603 SMD", Forward Current If=30, Forward Voltage=2, Manufacturer="WURTH ELEKTRONIK", Manufacturer Part Number=150060RS75000, Supplier Part Number 1=2322071, LED Colour=Red, LED Mounting=SMD, Lens Shape=Rectangular, Luminous Intensity=250, Storage Location="PCB Assembly WS", Supplier="ECE Dept", Supplier 1=Farnell, Viewing Angle=140°, Wavelength Typ=625
F1: library part FS_Fuse_5.0A, "Fuse 5.0A Fast Acting 1206 SMD", Case/Package=1206, Case Code (Metric)=3216, DC Cold Resistance=19mR, Manufacturer="Bel TRP", Manufacturer Part Number=C1F5, Max Operating Temperature=125°C, Min Operating Temperature=-55°C, Supplier Part Number 1=507-1886-1-ND, Voltage Rating=125V, Voltage Rating (DC)=63V, Approvals=CE,cURus, Case Code (Imperial)=1206, ComponentLink1Description=http://www.farnell.com/datasheets/2571625.pdf, ComponentLink1URL=http://www.farnell.com/datasheets/2571625.pdf, ComponentLink2Description=http://belfuse.com/pdfs/C1F.pdf, ComponentLink2URL=http://belfuse.com/pdfs/C1F.pdf, ComponentLink3Description=http://www.mouser.com/ds/2/643/C1F-594910.pdf, ComponentLink3URL=http://www.mouser.com/ds/2/643/C1F-594910.pdf, ComponentLink4Description=https://belfuse.com/resources/StewartConnector/C1F.pdf, ComponentLink4URL=https://belfuse.com/resources/StewartConnector/C1F.pdf, Contact Plating=Nickel,Tin, Current Rating=5A, Fuse Type="Board Mount (Cartridge Style Excluded)", Length=0.126inch, Mount="Surface Mount", Number of Pins=2, Packaging="Tape and Reel", Pricing 1="1=0.32, 5=0.312, 10=0.298, 50=0.2662, 100=0.2479, 250=0.22032, 500=0.1836, 1000=0.17442 (USD)", Stock 1=725, Supplier 1=Digi-Key, Supplier 2=Element14, Supplier Part Number 2=2848595, Voltage Rating (AC)=125V, Width=0.062inch
H1: library part JA_HDR_IDC_5X2_VERT, "IDC Header, 2,54mm, 10-Pin, Vert", Supplier Part Number 1=1096985, Storage Location="ECE Dept Store", Supplier="ECE Dept", Supplier 1=Farnell
H2 H4 H5 H6: library part JB_53398-02, "Header_Vert_2Pos_1.25mm_125V@1A_SMT", Manufacturer="Molex Inc", Manufacturer Part Number=0533980271, Supplier Part Number 1=WM7606CT-ND, Contact Type="Blade Pin", Mounting Type="Surface Mount", Number of Positions=2, Pitch="0.049\" (1.25mm)", Storage Location="PCB Assembly WS", Supplier="ECE Dept", Supplier 1=Digi-Key
H3 H8: "3Pin Header 2.54mm spacing"
H7: library part JS_USB_MINI_B_SMT, "USB 2.0, Right Angle, SMT, B Type, Receptacle, 5 Position,", Manufacturer=FCI, Manufacturer PN=10033526-N3212MLF, Supplier Part Number 1=1824416, Storage Location="PCB Assembly WS", Supplier="ECE Dept", Supplier 1=Farnell
L1: library part CDRH104RNP-5R2NC, "FIXED IND 5.2UH 6A 22 MOHM SMD", Current - Saturation=5.6A, DC Resistance (DCR)="22 mOhm Max", Frequency - Self Resonant=-, Manufacturer="Sumida America Components Inc.", Operating Temperature="-40°C ~ 100°C", Package / Case=Nonstandard, Supplier Part Number 1=308-2280-1-ND, Tolerance=±30%, Category="Inductors, Coils, Chokes", ComponentLink1Description=http://products.sumida.com/products/pdf/CDRH104R.pdf, ComponentLink1URL=http://products.sumida.com/products/pdf/CDRH104R.pdf, Height - Seated (Max)="0.157\" (4.00mm)", Manufacturer Part Number=CDRH104RNP-5R2NC, Material - Core=Ferrite, Mounting Type="Surface Mount", Packaging="Cut Tape (CT)", Part Status=Active, Pricing 1="1=2.9, 10=2.678, 100=1.8743, 500=1.5173 (NZD)", Q @ Freq=-, Ratings=-, RoHS="RoHS Compliant", Shielding=Shielded, Size / Dimension="0.402\" L x 0.394\" W (10.20mm x 10.00mm)", Stock 1=3849, Supplier 1=Digi-Key, Supplier Device Package=-, Type=-
L2 L3: library part IN_Ferrite-Bead, "Ferrite Bead, Rdc 0.3R, Z100MHZ 600R, Imax 1A, SMD 1206", DC Current Rating=1, DC Resistance Max=0.08, Ferrite Case Style="1206 ^3216 Metric]", Frequency Range="50MHz to 1", Impedance Tolerance="± 25%", Manufacturer=FAIR-RITE, Manufacturer Part Number=2512066017Y1, Supplier Part Number 1=1612060, Ferrite Mounting=SMD, Impedance=600, Manufacturer PN=2512066017Y1, Storage Location="PCB Assembly WS", Supplier="ECE Dept", Supplier 1=Farnell
LS1: "Buzzers Transducer, Externally Driven Piezo 3V 4kHz 60dB @ 3V, 10cm Through Hole PC Pins", Package="2020 TDK", Availability=Unavailable, MF=TDK, MP=PS1240P02BT, Price=None, SnapEDA_Link=https://www.snapeda.com/parts/PS1240P02BT/TDK/view-part/53420/?ref=snap
Q1: library part TB_BC817W, "NPN GP Bipolar Transistor 45V 500mA SOT323", Manufacturer=NXP, Supplier Part Number 1=2114873, Manufacturer PN=BC817W, Storage Location="PCB Assembly WS", Supplier="ECE Dept", Supplier 1=Farnell
R1 R5 R6 R11 R13 R17 R19 R20: library part RS_0R0, "RES 0.0 OHM 1/10W 5% 0603 SMD", Storage Location="PCB Assembly WS", Supplier="ECE Dept"
R2: library part RS_200K, "RES 200K OHM 1/10W 5% 0603 SMD", Storage Location="PCB Assembly WS", Supplier="ECE Dept"
R3 R4: library part RS_100K, "RES 100K OHM 1/10W 5% 0603 SMD", Storage Location="PCB Assembly WS", Supplier="ECE Dept"
R7: library part RT_1R, "RES 1R OHM 1/4W 5% 1206 SMD", Storage Location="PCB Assembly WS", Supplier="ECE Dept"
R8 R9: library part RS_2K2, "RES 2.2K OHM 1/10W 5% 0603 SMD", Storage Location="PCB Assembly WS", Supplier="ECE Dept"
R10 R16: library part RS_10R, "RES 10 OHM 1/10W 5% 0603 SMD", Storage Location="PCB Assembly WS", Supplier="ECE Dept"
R12: library part RS_470R, "RES 470 OHM 1/10W 5% 0603 SMD", Storage Location="PCB Assembly WS", Supplier="ECE Dept"
R14: library part RS_680R, "RES 680 OHM 1/10W 5% 0603 SMD", Storage Location="PCB Assembly WS", Supplier="ECE Dept"
R15 R18: library part RS_1K, "RES 1.0K OHM 1/10W 5% 0603 SMD", Storage Location="PCB Assembly WS", Supplier="ECE Dept"
R21 R22: library part RS_27R, "RES 27 OHM 1/10W 5% 0603 SMD", Storage Location="PCB Assembly WS", Supplier="ECE Dept"
S1 S2: library part WS_EVQPNF05M, "Panasonic 6 x 3.5mm SMD Light Touch Switch Type SMD", Manufacturer=Panasonic, Supplier Part Number 1=2079481, Manufacturer PN=EVQPNF05M, PackageDescription="6.0 x 3.5 mm", Storage Location="PCB Assembly WS", Supplier="ECE Dept", Supplier 1=Farnell, Supplier 2=Digi-Key, Supplier Part Number 2=P13598SCT-ND
T1: library part TM_BSH105, "MOSFET N-CH 20V 1.05A SOT-23", Current - Continuous Drain (Id) @ 25° C=1.05A, Drain to Source Voltage (Vdss)=20V, Input Capacitance (Ciss) @ Vds="152pF @ 16V", Manufacturer="NXP Semiconductors", Package / Case="TO-236-3, SC-59, SOT-23-3", Power - Max=417mW, Supplier Part Number 1=1758066, FET Type="MOSFET N-Channel, Metal Oxide", Gate Charge (Qg) @ Vgs="3.9nC @ 4.5V", Manufacturer Part Number=BSH105,215, Pricing="1=0.53, 10=0.42, 25=0.3544, 100=0.2885, 250=0.23896, 500=0.1974, 1000=0.14785 (NZD)", Rds On (Max) @ Id, Vgs="200 mOhm @ 600mA, 4.5V", Storage Location="PCB Assembly WS", Supplier="ECE Dept", Supplier 1=Farnell, Supplier 2=Digi-Key, Supplier Part Number 2=568-6215-1-ND
U1: library part ADP2302ARDZ-5.0-R7, "IC REG BUCK 5V 2A 8SOIC", Current - Output=2A, Frequency - Switching=700kHz, Supplier Part Number 1=ADP2302ARDZ-5.0-R7CT-ND, Voltage - Input (Max)=20V, Voltage - Output (Min/Fixed)=5V, Manufacturer_Part_Number=ADP2302ARDZ-5.0-R7, Output Type=Fixed, Supplier 1=Digi-Key, Type=DEV, Vendor="Analog Devices Inc"
U2: "9 axis IMU"
U3 U8: library part SV_CAT6219-330TDGT3, "IC REG LIN 3.3V 500MA TSOT23-5", Base Part Number=CAT6219, Current - Output=500mA, Package / Case="SOT-23-5 Thin, TSOT-23-5", Supplier Device Package=TSOT-23-5, Supplier Part Number=CAT6219-330TDGT3CT-ND, Voltage - Input (Max)=5.5V, Voltage - Output (Min/Fixed)=3.3V, Voltage Dropout (Max)="0.5V @ 500mA", ComponentLink1Description=http://www.onsemi.com/pub/Collateral/CAT6219-D.PDF, ComponentLink1URL=http://www.onsemi.com/pub/Collateral/CAT6219-D.PDF, Manufacturer Part Number=CAT6219-330TDGT3, Supplier=Digi-Key, Supplier 1=Digi-Key
U4: library part SE_ATSAM4S16BA-MU, "IC MCU 32BIT 512KB FLASH 64LQFP", Manufacturer=Atmel, Package / Case=64-LQFP, Supplier Part Number 1=ATSAM4S8BA-ANRCT-ND, Voltage - Supply (Vcc/Vdd)="1.62 V ~ 3.6 V", Code_JEDEC=MO-220VMMD-3, ComponentLink1Description="Manufacturer URL", ComponentLink1URL=http://www.atmel.com/, ComponentLink2Description="SAM4S Series Datasheet", ComponentLink2URL=http://www.atmel.com/dyn/resources/prod_documents/11100.pdf, ComponentLink3Description="SAM4S Series Summary", ComponentLink3URL=http://www.atmel.com/dyn/resources/prod_documents/11100S.pdf, Connectivity="I²C, IrDA, Memory Card, SPI, SSC, UART/USART, USB", Core Processor="ARM® Cortex®-M4", Core Size=32-Bit, Data Converters="A/D 11x12b, D/A 2x12b", Manufacturer Part Number=ATSAM4S8BA-ANR, Number of I/O=47, PackageDescription="64-Pin Quad Flat No-Lead (QFN) Sawn, 9 x 9 x 1.0 mm Body, 0.5 mm Pitch, Exposed Pad", PackageReference=64PS, PackageVersion="revJ, Jul-2007", Packaging="Cut Tape (CT)", Peripherals="Brown-out Detect/Reset, DMA, POR, PWM, WDT", Program Memory Size="512KB (512K x 8)", Program Memory Type=FLASH, RAM Size="128K x 8", Speed=120MHz, Supplier 1=Digi-Key
U6: library part NRF24, "nRF24 SMD Module", Warning="No power planes near or under device"
U7: "1.8V - 5V level converter"
VR1: "JOYSTICK 10K OHM 2 AXIS TH", Manufacturer 1=SparkFun, Manufacturer Part Number 1=COM-09032, Supplier Part Number 1=1568-1526-ND, ComponentLink1Description=https://media.digikey.com/pdf/Data%20Sheets/Sparkfun%20PDFs/COM-09032_Web.pdf?src-supplier=Digi-Key, ComponentLink1URL=https://media.digikey.com/pdf/Data%20Sheets/Sparkfun%20PDFs/COM-09032_Web.pdf?src-supplier=Digi-Key, Pricing 1="1=3.95000 (USD)", RoHS=No, Stock 1=563, Supplier 1=Digi-Key
Y1: library part XT_CRYSTAL_12MHz_18pF, "CRYSTAL 12MHZ 18PF 6X3.5mm SMD", ESR (Equivalent Series Resistance)="60 Ohm", Frequency Stability=±50ppm, Frequency Tolerance=±30ppm, Load Capacitance=18pF, Manufacturer="CTS-Frequency Controls", Manufacturer Part Number=406C35D12M00000, Operating Mode=Fundamental, Operating Temperature="-20°C ~ 70°C", Package / Case="4-SMD, No Lead (DFN, LCC)", Supplier Part Number 1=CTX855CT-ND, Frequency=12MHz, Height="0.047\" (1.20mm)", Mounting Type="Surface Mount", Size / Dimension="0.236\" L x 0.138\" W (6.00mm x 3.50mm)", Supplier 1=Digi-Key

## Via types
v1: diameter 1.27, hole 0.711, Top Side to Bottom Side, 85 vias
v2: diameter 1.27/1.27 (per signal layer), hole 0.711, Top Side to Bottom Side, 1 vias
v3: diameter 1.3, hole 1.1, Top Side to Bottom Side, 1 vias
v4: diameter 2, hole 1.5, Top Side to Bottom Side, 1 vias

## Nets (pads, with @x,y where several pads share a name; then routed paths per layer and width w, separated by ;. In a path a pad name is that pad's centre, name@x,y a point inside that pad or via, vN(x,y) a via of type N, cw(c..) or ccw(c..) an arc to the next point about the centre after c; other vN are vias at no path point)
3V3: C5.2 C7.2 C13.2 C15.2 C17.2 C20.1 C21.1 C28.2 DL1.2 DL2.2 H1.7 H1.8 R6.2 R8.2 R9.1 TP1.1 TP15.1 U2.1 U2.8 U2.13 U2.22 U4.1 U4.7 U4.18 U4.45 U4.58 U7.6 VR1.1 VR1.4 | length 45.7
  Top Side w0.2: 33.85,56.1 34.1,55.85 U4.58 ; 38.15,30.235 U2.22
  Top Side w0.3: U7.6 U7.6@16.55,49.95 ; v1(21.9,40.55) TP15.1 ; v1(31.125,45.875) v1@31.2,45.95 ; v1@32.25,56.1 33.85,56.1 ; U2.8 46.115,29.835 46.45,29.5 46.45,28.95 v1(45.55,28.05) ; H1.8 61.2,40.28 DL1.2 DL2.2 ; TP1.1 v1(60.2,65.35)
  Top Side w0.35: U7.6@16.55,49.95 17.2,49.95 C28.2
  Top Side w0.6: U7.6 v1(16.4,52.1) ; R6.2 v1(21.9,40.55) ; v1(22.25,61.5) C7.2 ; v1@31.2,45.95 C13.2 ; R9.1 v1(38.5,32) R8.2 ; C20.1 v1@43.7,35.9
  Top Side w0.8: C21.1 v1(43.15,26.45)
  Bottom Side w0.6: C5.2 31.15,60.3 v1(32.2,59.05) ; v1@32.25,56.1 C15.2
  other v1: 43.65,35.95 32.15,56.4
3V3RF: L3.1 R5.2 TP19.1 | length 5.7
  Top Side w0.6: TP19.1@2,58 L3.1 R5.2
5V: C9.2 C11.2 C27.2 R1.2 R13.2 R19.2 R20.2 TP17.1 U3.1 U3.3 U7.1 U8.1 | length 23.7
  Top Side w0.3: U7.1@13.85,49.95 U7.1 ; U3.3 18.4,35.9 18.75,36.25 18.75,37.475 18.425,37.8 U3.1
  Top Side w0.35: C27.2 13.05,49.95 U7.1@13.85,49.95
  Top Side w0.5: v1(44.15,17.05) 45.65,17.05 R13.2
  Top Side w0.6: R19.2 v1(7.05,55.15) U8.1 C9.2@8.85,53.75 ; R20.2 v1(12.4,44.7) ; U7.1 v1(14,52.1) ; C11.2 U3.1 v1(17.65,39.5)
  Top Side w0.9: R1.2@16.7,30.4 v1@16.7,31.85
  Top Side w1: TP17.1@2.6,27.25 v1(5.75,27.25)
  other v1: 16.7,31.875
ACC_INT: TP5.1 U2.12 U4.35 | length 33.8
  Top Side w0.2: U2.12 46.135,31.435 46.45,31.75 46.45,32.4 46.1,32.75 ; v1(45.05,32.75) 46.1,32.75 ; TP5.1 47.6,34.25 46.1,32.75
  Top Side w0.3: v1(26.95,46.55) U4.35
  Bottom Side w0.3: v1@26.925,46.525 40.7,32.75 v1(45.05,32.75)
ACC_SCL: R9.2 TP14.1 U2.23 U4.36 | length 27.1
  Top Side w0.2: R9.2 37.397,29.859 U2.23
  Top Side w0.3: U4.36 27.45,47.75 28.4,46.8 28.4,38.307 32.386,34.585 R9.2
ACC_SDA: R8.1 TP10.1 U2.24 U4.43 | length 32.1
  Top Side w0.2: R8.1 39.2,29.1 39.535,29.435 U2.24
  Top Side w0.3: v1(29.75,41.45) 29.885,41.585 29.885,47.475 30.95,48.54 U4.43 ; TP10.1@35.75,29.1 36.1,29.1 R8.1 ; v1(38.5,27.75) R8.1@38.5,29.05
  Bottom Side w0.3: v1(29.75,41.45) 29.75,36.55 38.5,27.8 v1(38.5,27.75)
AUX_BUTTON_1: S2.2 U4.49 | length 35
  Top Side w0.3: U4.49 36.45,51.35 v1(39.5,48.3) ; v1(52.8,30.8) 52.8,29.5 S2.2@56.45,25.85
  Bottom Side w0.3: v1(39.5,48.3) 52.8,35 v1(52.8,30.8)
BAT_NEG: H3.1 H3.3 T1.3
BAT_POS: F1.1 H3.2 R2.2 T1.1 | length 10.9
  Top Side w0.3: T1.1 4.3,17.3 4.75,16.85 5.9,16.85
  Top Side w0.6: R2.2 6.6,19.45 F1.1
  Top Side w1: H3.2 5.9,16.85 F1.1
BAT_SENSE: BTS.1 R2.1 R4.2 U4.11 | length 57.1
  Top Side w0.3: BTS.1 3.85,23.6 R4.2 v1(5.4,22.4) R2.1 ; v1(26.9,57.55) 26.9,57.925 28.45,59.475 U4.11
  Bottom Side w0.3: v1(5.4,22.4) 5.4,23.619 7.8,26.019 7.8,36.925 ; 7.8,36.95 21.8,50.95 21.8,53.2 20.95,54.05 20.95,56.1 22.4,57.55 v1(26.9,57.55)
CHANNEL_SEL_0: H6.2 U4.3 | length 20.4
  Top Side w0.3: U4.3 32.45,72.376 36.7,76.626 H6.2
CHANNEL_SEL_1: H5.2 U4.4 | length 19.1
  Top Side w0.3: H5.2 30.8,72.2 31.95,71.05 U4.4
CHANNEL_SEL_2: H4.2 U4.5 | length 21.4
  Top Side w0.3: H4.2 24.7,75.236 31.45,68.486 U4.5
CHANNEL_SEL_3: H2.2 U4.6 | length 26.4
  Top Side w0.3: H2.2 18.6,76.2 19.8,75 24.3,75 30.95,68.35 U4.6
D_N: R21.2 U4.56 | length 27.3
  Top Side w0.381: R21.2@13.775,38.775 29.8,54.8 34.45,54.8
D_P: R22.2 U4.57 | length 29.9
  Top Side w0.381: R22.2 12.95,39.35 13.35,39.75 13.95,39.75 29.55,55.35 34.45,55.35
GND: C1.1 C3.1 C4.1 C5.1 C6.2 C7.1 C8.2 C9.1 C10.1 C11.1 C12.1 C13.1 C14.2 C15.1 C16.2 C17.1 C19.1 C20.2 C21.2 C22.1 C23.2 C24.1 C25.1 C26.2 C27.1 C28.1 C29.1 CA1.1 D1.1 H1.5 H1.6 H2.1 H4.1 H5.1 H6.1 H7.5 H7.6 H7.7 H7.8 H7.9 H8.3 Q1.2 R4.1 R7.1 R11.1 R18.1 S1.1 S2.1 T1.2 TP16.1 TP18.1 TP20.1 TP22.1 U1.7 U1.EPAD U2.9 U2.18 U2.20 U3.2 U4.2 U4.17 U4.46 U4.60 U6.2 U7.2 U7.5 U8.2 VR1.3 VR1.6 VR1.8 VR1.9 Y1.2 Y1.4 | length 152.3
  Top Side w0.2: U2.20 41.822,31.035 ; U2.9 46.365,30.235 v1(47.9,28.7)
  Top Side w0.3: v1(2.4,20.05) R4.1 ; H7.7 H7.7@2.6,33.35 ; H7.6 8.15,33.5 H7.5 ; v1(10.95,49.85) v1@11.05,49.85 ; U7.2 U7.5 ; U1.7 18.365,24.865 v4(19,25.5) ; H2.1 H4.1 H5.1 H6.1 v1@39.4,80.5 ; v1@32.6,46 v1(32.7,45.9) ; v1(33.6,57.5) 34.45,56.85 U4.60 ; U2.18 v1(41.693,34.65) ; 41.822,31.035 42.407,30.45 v3@42.6,30.45 ; C23.2@48.8,30.6 R11.1@48.8,31.95 ; H1.5@56.94,44.5 H1.5 ; v1(60.45,22.9) S2.1@60.45,25.8 ; v1(60.531,53.931) 60.55,53.95 S1.1
  Top Side w0.5: v1@11.05,49.85 11.75,49.15 C27.1 U7.2 ; U7.5 C28.1 18.5,49.15 v1(19.2,49.85)
  Top Side w0.6: H8.3 4.35,47.91 5.14,48.7 C29.1 ; C22.1 3.7,64.8 ; U6.2 3.7,64.8 ; v1(4.25,64.1) 4.25,64.25 3.7,64.8 ; v1(4.9,57.85) C10.1 ; C9.1 9.7,52.4 v1(10.6,53.3) 9.8,54.1 U8.2 ; C26.2@10.8,42.5 v1(10.8,44.15) ; v1(16.2,34.65) C11.1 U3.2 ; v1(20.95,64.9) TP18.1 ; C4.1 v1(21.3,31.8) ; C12.1 v1(23.8,36.35) ; v1(23.1,22.05) C1.1 ; C6.2@29.95,63.7 v1(29.95,64.819) ; v1@32.6,46 C13.1 ; C17.1 v1(35.2,64.35) ; TP20.1 v1(41.693,34.65) ; Y1.2 v1(41.3,58.3) ; v1(40.3,24.75) C21.2 ; C25.1 v1(41.3,58.3) ; Q1.2 R18.1 v1(43.3,13) ; TP22.1@44.4,58.3 v1(41.3,58.3) ; C20.2@45.2,34.593 v1(45.2,36) ; C23.2@48.8,30.6 v1(50.1,30.6)
  Top Side w0.7: C7.1 v1(23.85,61.5)
  Top Side w0.8: v1(10.45,29.8) C3.1 ; v1(13.2,5.55) D1.1 v1(16.125,2.25) ; C24.1 v1(40.05,61.8)
  Top Side w1: TP16.1 H7.7@2.6,33.35 ; H7.6 v1(5.3,33.4) H7.7 H7.9 v1(5.3,42.3) H7.8 ; CA1.1@10.45,27.033 v1(10.45,29.8) v1@10.45,29.85
  Bottom Side w0.6: C14.2 v1(26.2,55.35) ; C8.2 28.45,59 v1(29.05,58.4) 29.75,58.9 C5.1 v1(30.45,57.65) ; v1@30.55,51.65 C16.2 ; v1@33.65,57.5 33.9,57.5 35.05,56.35 C15.1 ; C19.1 v1(35.2,64.35) R7.1@36.65,63.85
  other v1: 30.538,51.638 39.45,80.5
  other v3: 42.693,30.435
JOYSTICK_BUT: U4.14 VR1.7 VR1.10 | length 41.9
  Top Side w0.3: v1(26.15,63.15) 26.95,62.35 U4.14
  Bottom Side w0.3: v1(26.15,63.15) 27.55,63.15 28.55,64.15 28.55,65.1 31,67.55 43.65,67.55 45.26,69.16 VR1.10 VR1.7
JOYSTICK_POTA: TP6.1 U4.16 VR1.2 | length 27.9
  Top Side w0.3: v1(24.9,64.4) 24.9,62.8 25.95,61.75 U4.16 ; TP6.1 VR1.2
  Bottom Side w0.3: v1(24.9,64.4) 33.03,72.53 VR1.2
JOYSTICK_POTB: TP11.1 U4.13 VR1.5 | length 59
  Top Side w0.3: v1(27.15,64.65) 27.15,63.46 27.45,63.16 U4.13 ; TP11.1@37,68.4 42.4,68.4 50.1,76.1 VR1.5
  Bottom Side w0.3: v1(27.15,64.65) 30.9,68.4 42.4,68.4 50.1,76.1 VR1.5
LED_STRIP_DATA_IN: TP3.1 U4.30 U7.4 | length 12.5
  Top Side w0.3: TP3.1@16.1,45.6 TP3.1 ; TP3.1@16.4,46.25 U7.4 20.45,48.2 22.405,50.155 22.405,51.705 23.05,52.35 U4.30
LED_STRIP_DATA_OUT: H8.2 TP8.1 U7.3 | length 16.8
  Top Side w0.3: H8.2 5.9,50.45 8.15,48.2 ; TP8.1 8.15,48.2 ; U7.3 8.15,48.2
NetC1_2: C1.2 CA1.2 F1.2 R3.1 U1.2 U1.3 | length 24.4
  Top Side w0.3: U1.2 U1.3 ; C1.2 R3.1
  Top Side w0.8: C1.2 v1(24.85,24.85)
  Top Side w1: F1.2 12.05,18.5 13.4,19.85 v2(18.15,19.85) ; F1.2@10.461,18.511 CA1.2
  Bottom Side w1: v2(18.15,19.85) 23.15,24.85 v1@24.828,24.85
NetC2_1: C2.1 U1.1 | length 1.3
  Top Side w0.3: C2.1 21.311,22.261 U1.1
NetC2_2: C2.2 D1.2 L1.1 U1.8 | length 24.7
  Top Side w0.3: U1.8 16.689,23.011 20.5,19.2 22.25,19.2 ; C2.2@21.287,20.812 22.25,19.85 22.25,19.2 ; L1.1 24.2,17.25 22.25,19.2
  Top Side w0.8: D1.2 23.075,9.675 24.2,10.8 L1.1
NetC3_2: C3.2 C4.2 L1.2 R1.1 U1.5 | length 18.8
  Top Side w0.3: v1@14.995,27.405 v1(15,27.405) U1.5
  Top Side w0.6: C3.2@15.012,29.812 16,28.8 R1.1 17.6,28.8 C4.2
  Top Side w0.8: L1.2 v1(15,17.65)
  Bottom Side w0.8: v1(15,17.65) v1(15,27.405)
NetC10_2: C10.2 R5.1 U8.5 | length 4.2
  Top Side w0.6: C10.2 U8.5 8.85,59.75 R5.1
NetC12_2: C12.2 R6.1 U3.5 | length 2.6
  Top Side w0.6: R6.1 U3.5 C12.2@21.75,37.8
NetC18_1: C18.1 R7.2 | length 2.6
  Bottom Side w0.6: C18.1 38.2,62.5 R7.2@39.4,63.7
NetC22_2: C22.2 R10.1 U6.1 | length 2.9
  Top Side w0.6: R10.1@1.45,63.6 C22.2 U6.1@2.429,66.2
NetC23_1: C23.1 U2.10 | length 2.5
  Top Side w0.2: U2.10 C23.1@47.35,30.635
NetC24_2: C24.2 U4.62 Y1.3 | length 1.9
  Top Side w0.8: Y1.3 C24.2
NetC25_2: C25.2 U4.61 Y1.1 | length 1.7
  Top Side w0.8: Y1.1 C25.2
NetC29_2: C29.2 H8.1 R19.1 | length 4.8
  Top Side w0.6: C29.2 R19.1
  Top Side w0.7: H8.1 R19.1@5.55,53.002
NetDL1_1: DL1.1 R12.1 | length 2.2
  Top Side w0.3: R12.1 DL1.1
NetDL2_1: DL2.1 R14.1 | length 2.2
  Top Side w0.3: R14.1 DL2.1
NetH7_2: H7.2 R21.1 | length 4
  Top Side w0.381: H7.2 R21.1@12.15,38.65
NetH7_3: H7.3 R22.1 | length 3.3
  Top Side w0.381: H7.3 R22.1@11.4,37.85
NetL3_2: L3.2 R10.2 | length 1.7
  Top Side w0.6: L3.2 R10.2
NetLS1_2: LS1.2 R13.1 R15.2 | length 10.6
  Top Side w0.5: R13.1 R15.2 LS1.2
NetQ1_1: Q1.1 R17.2 | length 1.5
  Top Side w0.5: R17.2 Q1.1
NetR3_2: R3.2 U1.4 | length 1.8
  Top Side w0.3: U1.4 R3.2@23.095,27.405
NetR11_2: R11.2 U2.11 | length 2.8
  Top Side w0.2: U2.11 46.335,31.035 R11.2
NetR16_2: R16.2 R17.1 | length 1.4
  Top Side w0.5: R16.2 R17.1
NetTP2_1: TP2.1 U4.55 | length 24.8
  Top Side w0.3: U4.55 36.263,54.35 36.613,54 44.35,54 52.4,62.05 TP2.1
nRF_CE: U4.28 U6.3 | length 26.5
  Top Side w0.3: U6.3 4.971,64.701 6.15,63.522 v1(6.15,63.1) ; v1(19.6,53.35) U4.28
  Bottom Side w0.3: v1(6.15,63.1) 14.7,54.55 17.094,54.55 18.294,53.35 v1(19.6,53.35)
nRF_CSN: U4.20 U6.4 | length 27.4
  Top Side w0.3: 6.24,64.66 v1(14.7,56.2) ; 6.243,64.662 U6.4 ; v1(18.6,59.9) 19.55,59.9 22.1,57.35 U4.20
  Bottom Side w0.3: v1(14.7,56.2) 15.95,57.45 15.95,59.15 16.7,59.9 v1(18.6,59.9)
nRF_IRQ: U4.19 U6.8 | length 16.6
  Top Side w0.3: U6.8 11.35,66.979 13.344,66.979 22.472,57.85 U4.19
nRF_MISO: TP13.1 U4.27 U6.7 | length 22
  Top Side w0.3: U6.7 10.057,65.993 v1(17.2,58.85) ; v1(17.2,55.75) 18.45,54.5 20.95,54.5 21.6,53.85 U4.27
  Bottom Side w0.3: v1(17.2,55.75) v1(17.2,58.85)
nRF_MOSI: U4.22 U6.6 | length 22.8
  Top Side w0.3: U6.6 8.786,64.914 15.85,57.85 v1(19.25,57.85) ; v1(19.2,55.75) 20.35,55.75 20.95,56.35 U4.22
  Bottom Side w0.3: v1(19.2,55.75) 19.25,55.8 v1(19.25,57.85)
nRF_POWER_ENABLE: U4.29 U8.3 | length 15.1
  Top Side w0.3: U8.3 v1(12.5,55.15) ; v1(20.65,52) 21.5,52.85 U4.29
  Bottom Side w0.3: v1(12.5,55.15) 13.9,53.75 16.9,53.75 18.65,52 v1(20.65,52)
nRF_SCK: U4.21 U6.5 | length 22.1
  Top Side w0.3: 7.514,64.861 15.524,56.85 U4.21 ; 7.514,64.861 U6.5
PIEZO_DRIVE: R16.1 R18.2 TP12.1 U4.33 | length 48.2
  Top Side w0.3: U4.33@25.95,49.55 25.95,43.95 27.65,42.25 27.65,23.6 38.25,13 ; TP12.1@37,10.45 37,11.75 38.25,13 ; R18.2 38.25,13
  Top Side w0.5: R18.2 R16.1
PIEZO_TP: LS1.1 Q1.3 R15.1 TP7.1 | length 22.2
  Top Side w0.5: TP7.1@43.75,8.15 48.75,8.15 50.75,10.15 ; Q1.3 R15.1 50.75,10.15 ; LS1.1@56.05,10.15 50.75,10.15
PROG_nRST: H1.1 S1.2 U4.39 | length 38.7
  Top Side w0.3: v1(28.95,47.8) U4.39 ; v1(56.05,53.75) 56.05,57.3 56.1,57.35 S1.2
  Bottom Side w0.3: v1(28.95,47.8) 30.75,49.6 H1.1 56.96,51.1 56.05,52.01 v1(56.05,53.75)
PROG_SWCLK: H1.2 U4.53 | length 25.8
  Top Side w0.3: U4.53 39.85,53.35 41.2,52 57.1,52 H1.2
PROG_SWDIO: H1.4 U4.51 | length 26.5
  Top Side w0.3: U4.51 38.35,52.35 42.4,48.3 58.26,48.3 H1.4
STATUS_LED0: R12.2 U4.48 | length 30.1
  Top Side w0.3: U4.48 33.45,48.5 34.685,47.265 39.835,47.265 54.675,32.425 R12.2
STATUS_LED1: R14.2 U4.47 | length 32
  Top Side w0.3: U4.47 32.95,48.364 38.064,43.25 38.1,43.25 41.6,39.75 46.674,39.75 54.25,32.174 54.25,31.4 55.225,30.425 R14.2
VCORE: C6.1 C8.1 C14.1 C16.1 L2.2 U4.8 U4.12 U4.24 U4.54 | length 11.3
  Top Side w0.3: U4.12 27.95,61.688 v1@28.45,62.188 ; v1(33.25,53.325) 33.512,53.325 34.037,53.85 U4.54
  Top Side w0.6: v1(28.45,62.2) C6.1
  Bottom Side w0.6: v1(22.35,55.35) C14.1 ; C8.1 v1(28.45,62.2) L2.2 ; C16.1 v1(33.25,53.325)
VPLL: C18.2 C19.2 L2.1 U4.64 | length 4.7
  Bottom Side w0.6: L2.1 C19.2 ; v1(35.2,60.2) C19.2 ; C18.2 C19.2
VUSB: C26.1 H7.1 R20.1 | length 5.6
  Top Side w0.3: R20.1@12.35,41.65 R20.1
  Top Side w0.6: H7.1 10.25,39.45 10.8,40 10.8,40.8 R20.1
pads on no net: H1.3 H1.9 H1.10 H2.M H4.M H5.M H6.M H7.4 H7.MH1 H7.MH2 U1.6 U2.2 U2.3 U2.4 U2.5 U2.6 U2.7 U2.14 U2.15 U2.16 U2.17 U2.19 U2.21 U3.4 U4.9 U4.10 U4.15 U4.23 U4.25 U4.26 U4.31 U4.32 U4.34 U4.37 U4.38 U4.40 U4.41 U4.42 U4.44 U4.50 U4.52 U4.59 U4.63 U8.4 VR1.11 VR1.12 VR1.13 VR1.14

## Polygon pours and split planes (outlines as drawn)
no net on Top Side "Top Side-No Net 5" (solid, pour order 20): 38.925,29.575
no net on Top Side "Top Side-No Net" (solid, pour order 12): 9.1,54.4
no net on Top Side "Top Side-No Net 1" (solid, pour order 10): 8.85,54.7
no net on Top Side "Top Side-No Net 2" (solid, pour order 4): 8.55,55
no net on Top Side "Top Side-No Net 3" (solid, pour order 2): 3.7,56.3
no net on Top Side "Top Side-No Net 4" (solid, pour order 0): 7.2,58.6
GND on Ground Plane (split plane): 63.49,0.51 0.51,0.51 0.51,67.5 26.2,67.5 32.917,74.217 38.1,78.9 38.1,84.49 63.49,84.49
5V on Power Plane (split plane): 15.071,54.527 15.071,44.55 15.08,44.5 15.108,44.458 19.171,40.396 19.171,34.45 19.18,34.4 19.208,34.358 20.058,33.508 20.1,33.48 20.15,33.471 22.296,33.471 35.458,20.308 35.5,20.28 35.55,20.271 63.49,20.271 63.49,0.51 0.51,0.51 0.51,54.971 4.25,54.971 4.3,54.98 4.342,55.008 5.704,56.371 12.936,56.371
3V3RF on Power Plane (split plane): 12.871,67.5 12.871,56.629 5.65,56.629 5.6,56.62 5.558,56.592 4.196,55.229 0.51,55.229 0.51,67.5
3V3 on Power Plane (split plane): 63.49,20.529 35.604,20.529 22.442,33.692 22.4,33.72 22.35,33.729 20.204,33.729 19.429,34.504 19.429,40.45 19.42,40.5 19.392,40.542 15.329,44.604 15.329,54.586 15.329,54.591 15.329,54.596 15.324,54.616 15.32,54.636 15.317,54.64 15.316,54.645 15.303,54.661 15.292,54.678 15.288,54.681 15.285,54.684 13.129,56.546 13.129,67.5 26.2,67.5 38.1,78.9 38.1,84.49 63.49,84.49
VCORE on Power Plane (split plane): 31.321,62.896 31.321,61.104 30.808,60.592 30.78,60.55 30.771,60.5 30.771,58.35 30.78,58.3 30.808,58.258 31.241,57.826 31.241,57.357 31.108,57.225 31.08,57.183 31.071,57.133 31.071,55.9 31.08,55.85 31.108,55.808 32.352,54.565 32.394,54.537 32.444,54.527 33.74,54.527 34.496,53.771 34.496,51.829 33.896,51.229 32.204,51.229 29.592,53.842 29.55,53.87 29.5,53.879 21.204,53.879 20.479,54.604 20.479,56.396 21.004,56.921 24.95,56.921 25,56.93 25.042,56.958 26.092,58.008 26.12,58.05 26.129,58.1 26.129,61.796 27.092,62.758 27.12,62.8 27.121,62.809 27.129,62.85 27.129,63.321 27.729,63.921 30.296,63.921

## Other copper
Top Side:
  region net 3V3: 33.35,60.625 33.55,60.625 33.55,59.8 33.8,59.55 33.8,58.9 33.4,58.55 32.2,58.55 32.2,59.55 33.1,59.55 33.35,59.8
  region net 3V3: 30.55,60.625 30.35,60.625 30.35,59.8 30.1,59.55 30.1,58.9 30.5,58.55 32.2,58.55 32.2,59.55 30.8,59.55 30.55,59.8
  region net NetC24_2: 35.225,57.95 35.225,57.75 36.1,57.75 36.15,57.7 37.25,57.7 37.75,58.2 37.75,59.9 36.65,59.9 36.65,58.3 36.35,58 36.15,58 36.1,57.95
  region net GND: 35.225,56.95 35.225,56.75 36.1,56.75 36.15,56.7 36.615,56.7 36.75,56.55 36.75,55.5 37.65,55.5 37.65,56.45 37.4,56.7 37.087,56.7 36.821,57 36.15,57 36.1,56.95
  region net 3V3: 22.1,59.6 22.1,59.1 22.1,58.8 22.6,58.25 22.85,58.25 23.5,58.25 23.5,58.45 23.25,58.45 22.8,58.9 22.8,59.1 22.8,59.6
  region net GND: 23.5,59.6 23.5,59.25 23.65,59.1 23.65,58.85 24.05,58.85 24.05,59.4 24.2,59.55 24.2,59.6
  region net VPLL: 35.3,58.85 35.3,59.212 35.5,59.362 35.5,60.2 34.9,60.2 34.9,59.362 35.1,59.213 35.1,58.85
  region net VCORE: 24.3,55.25 24.3,55.45 23.4,55.45 23.15,55.7 22.35,55.7 22.35,55 23.15,55 23.4,55.25
  region net 3V3: 43.8,33.7 43.8,33.6 43.75,33.6 43.6,33.6 43.6,33.7 43.6,33.8 43.4,34 43.4,34.15 44,34.15 44,34 43.8,33.8
  region: 41.45,33.1
  region: 43.6,33.6
  region net GND: 2.1,18.95 2.7,18.95 2.7,19.1 2.85,19.2 2.85,20.05 1.95,20.05 1.95,19.2 2.1,19.1
  region net BAT_NEG: 3.1,16.05 3.1,15.95 2.35,15.414 2.35,13.75 4.35,13.75 4.35,15.414 3.6,15.95 3.6,16.05
  region net VCORE: 29.825,61.525
  region net VCORE: 29.85,60.625 30.05,60.625 30.05,61.55 30.3,61.8 30.3,61.975 29.6,61.975 29.6,61.8 29.85,61.55
  region net GND: 33.75,64 33.55,64 32.75,63.2 32.75,61.5 32.85,61.4 32.85,60.625 33.05,60.625 33.05,61.4 33.15,61.5 33.15,62.1 33.35,62.3 33.35,62.55 33.35,62.95 33.75,63.3
  region net 3V3: 33.35,60.625 33.55,60.625 33.55,61.5 33.8,61.75 34.2,62.1 34.2,62.3 33.75,62.3 33.35,61.9
  region net NetC25_2: 35.225,57.45 35.225,57.25 36.1,57.25 36.15,57.2 36.88,57.2 37.18,56.95 38.15,56.95 39,56.006 39,55.5 40.2,55.5 40.2,56 38.7,57.5 36.15,57.5 36.1,57.45
  region net D_N: 34.3,54.95
  region: 34.15,54.9
  region net NetC3_2: 16.35,28.8 17.05,28.8 17.05,27.405 16.35,27.405
  region: 22.099,25.119
  region net NetC1_2: 22.3,25.05
  region net NetC1_2: 22.3,25.05
  region net NetC1_2: 22.1,25 22.1,24.75 22.3,24.75 22.54,24.45 22.75,24.45 22.75,25.25 22.55,25.25 22.3,25
  region net D_N: 34.05,54.625
  region: 44.05,33.7
  region net 3V3: 41.6,27.25 41.65,27.3 41.65,27.35 41.75,27.35 41.75,27.3 41.8,27.25 41.8,27.15 42,26.95 42,26.8 41.4,26.8 41.4,26.95 41.6,27.15
  region net GND: 32.35,49.575 32.55,49.575 32.55,48.7 32.6,48.65 32.6,47.9 32.7,47.8 32.7,47.7 32.2,47.7 32.2,47.8 32.3,47.9 32.3,48.65 32.35,48.7
  region net 3V3: 31.85,49.575 32.05,49.575 32.05,48.7 32.1,48.65 32.1,48.15 31.6,47.65 31.15,47.65 31.15,47.8 31.8,48.45 31.8,48.65 31.85,48.7
  region: 30.8,46.9
  region net GND: 24.5,59.175
  region net GND: 23.95,58.9
  region net GND: 24.1,59.1
  region net GND: 24.35,59.35
  region: 23.6,59.45
Ground Plane (plane layer: these items are gaps in the copper):
  region: -5.15,79.75
  pour cut-out: 0,67.5 26.2,67.5 32.917,74.217 38.1,78.9 38.1,85 -0.05,85
  lines w0.254: 0.1,67.7 0.3,67.5
Power Plane (plane layer: these items are gaps in the copper):
  pour cut-out: 0,67.5 26.2,67.5 38.1,78.9 38.1,85 0,85
  lines w0.254: 0,55.1 4.25,55.1 5.65,56.5 13,56.5 ; 13,67.5 13,56.486 15.2,54.586 15.2,44.55 19.3,40.45 19.3,34.45 20.15,33.6 22.35,33.6 35.55,20.4 64,20.4 ; 26,0 36.05,0 ; 20.35,54.55 20.35,56.45 20.95,57.05 24.95,57.05 26,58.1 26,61.85 27,62.85 27,63.375 27.675,64.05 30.35,64.05 31.45,62.95 31.45,61.05 30.9,60.5 30.9,58.35 31.371,57.879 31.371,57.304 31.2,57.133 31.2,55.9 32.444,54.656 33.794,54.656 34.625,53.825 34.625,51.775 33.95,51.1 32.15,51.1 29.5,53.75 21.15,53.75 20.35,54.55

## Silkscreen, mask and mechanical layers (free items; w line width, h text height)
Top Overlay:
  text "POTa" at 35.05,69.85 h1
  text "GND" at 19.7,69.05 h1
  text "MISO" at 14.15,65.35 h1 r315
  text "POTb" at 35,65.15 h1
  text "ERASE" at 49.9,62.6 h1
  text "3V3" at 63.1,60.75 h1 r90
  text "GND" at 43.15,60.25 h1
  text "3VRF" at 3.8,55.95 h1
  text "LEDI" at 18.4,45.5 h1
  text "LEDO" at 8.8,43.95 h1 r90
  text "3V3" at 23.25,42.35 h1
  text "SCL" at 32.6,36.95 h1 r315
  text "GND" at 36.3,36.4 h1
  text "INT" at 46.75,36.1 h1
  text "GND" at 4.85,30.5 h1
  text "5V" at 4.85,29.2 h1
  text "SDA" at 30.3,27.85 h1
  text "PZDRV" at 34.15,7.65 h1
  text "PZ" at 42.75,5.2 h1
  text "ENCE461 Hat Board Group 10" at 24.85,1.35 h1.52
Mechanical 1:
  region: 37.7,58.1
  region: 41.975,27
  region: 32.35,47.95
  region: 32.45,47.95

## Text inside footprints (layer, text, board x,y; h text height)
H1: Top Overlay "9" at 56.21,38.24 h1 r270; Top Overlay "10" at 58.75,38.24 h1 r270; Top Overlay "1" at 56.21,51.3 h1 r270; Top Overlay "2" at 58.75,51.8 h1 r270
H7: Mechanical 1 "PCB Edge" at -0.132,41.886 h1 r270
U1: Mechanical 13 "*" at 20.93,24.344 h1 r180
U6: Top Overlay "NO GND/ / POWER / PLANES / UNDER / OR NEARBY" at 2.529,72.275 h1